# EAGLE board 13513-Spectacle_Button_Board-panel.v10 (EAGLE 7.5.0), part 1 of 3
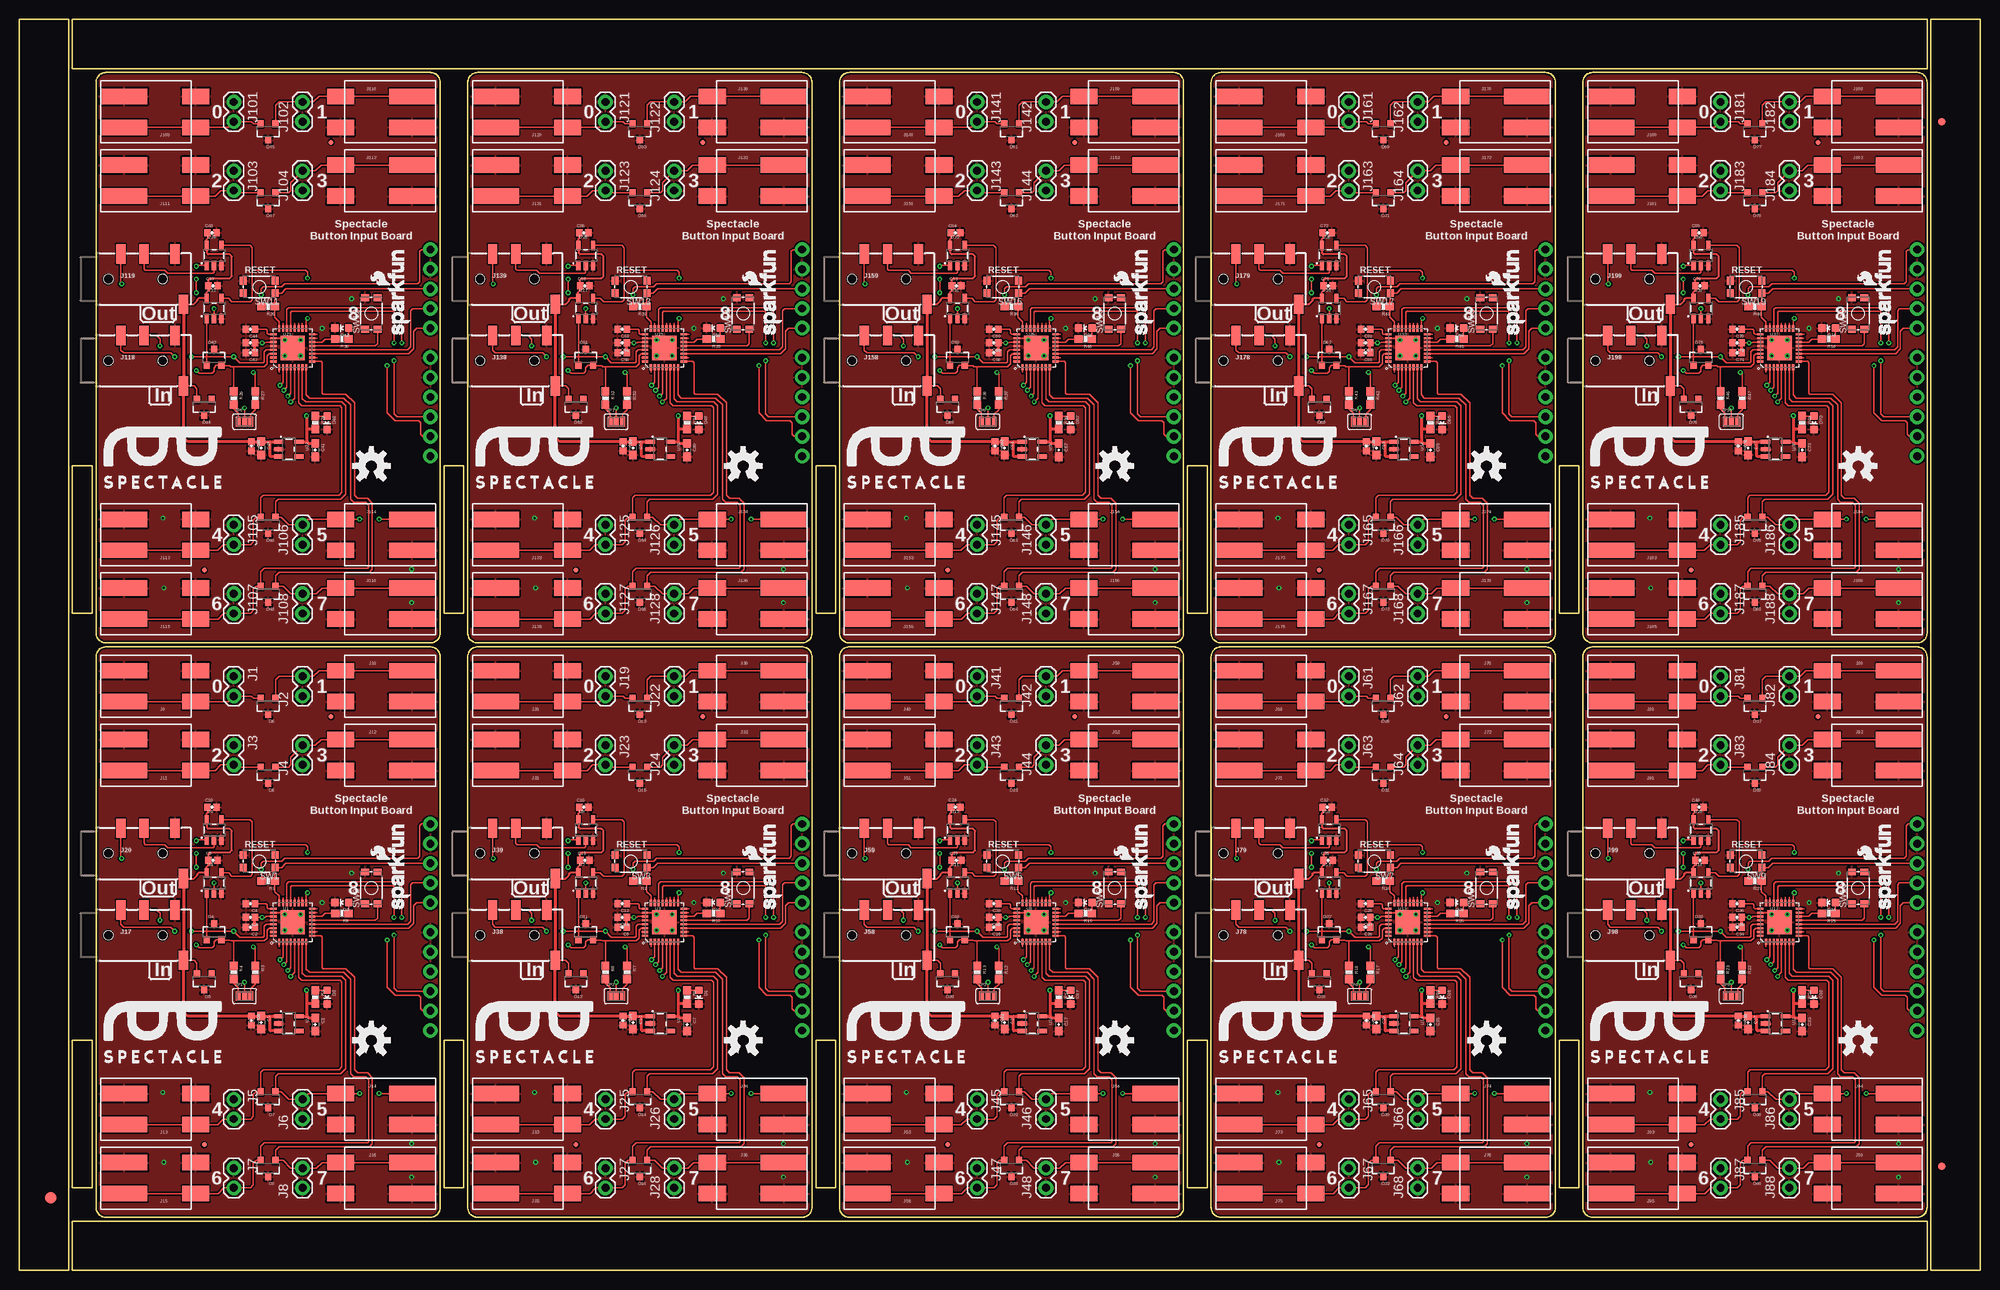
[diagram p0: board, top side]
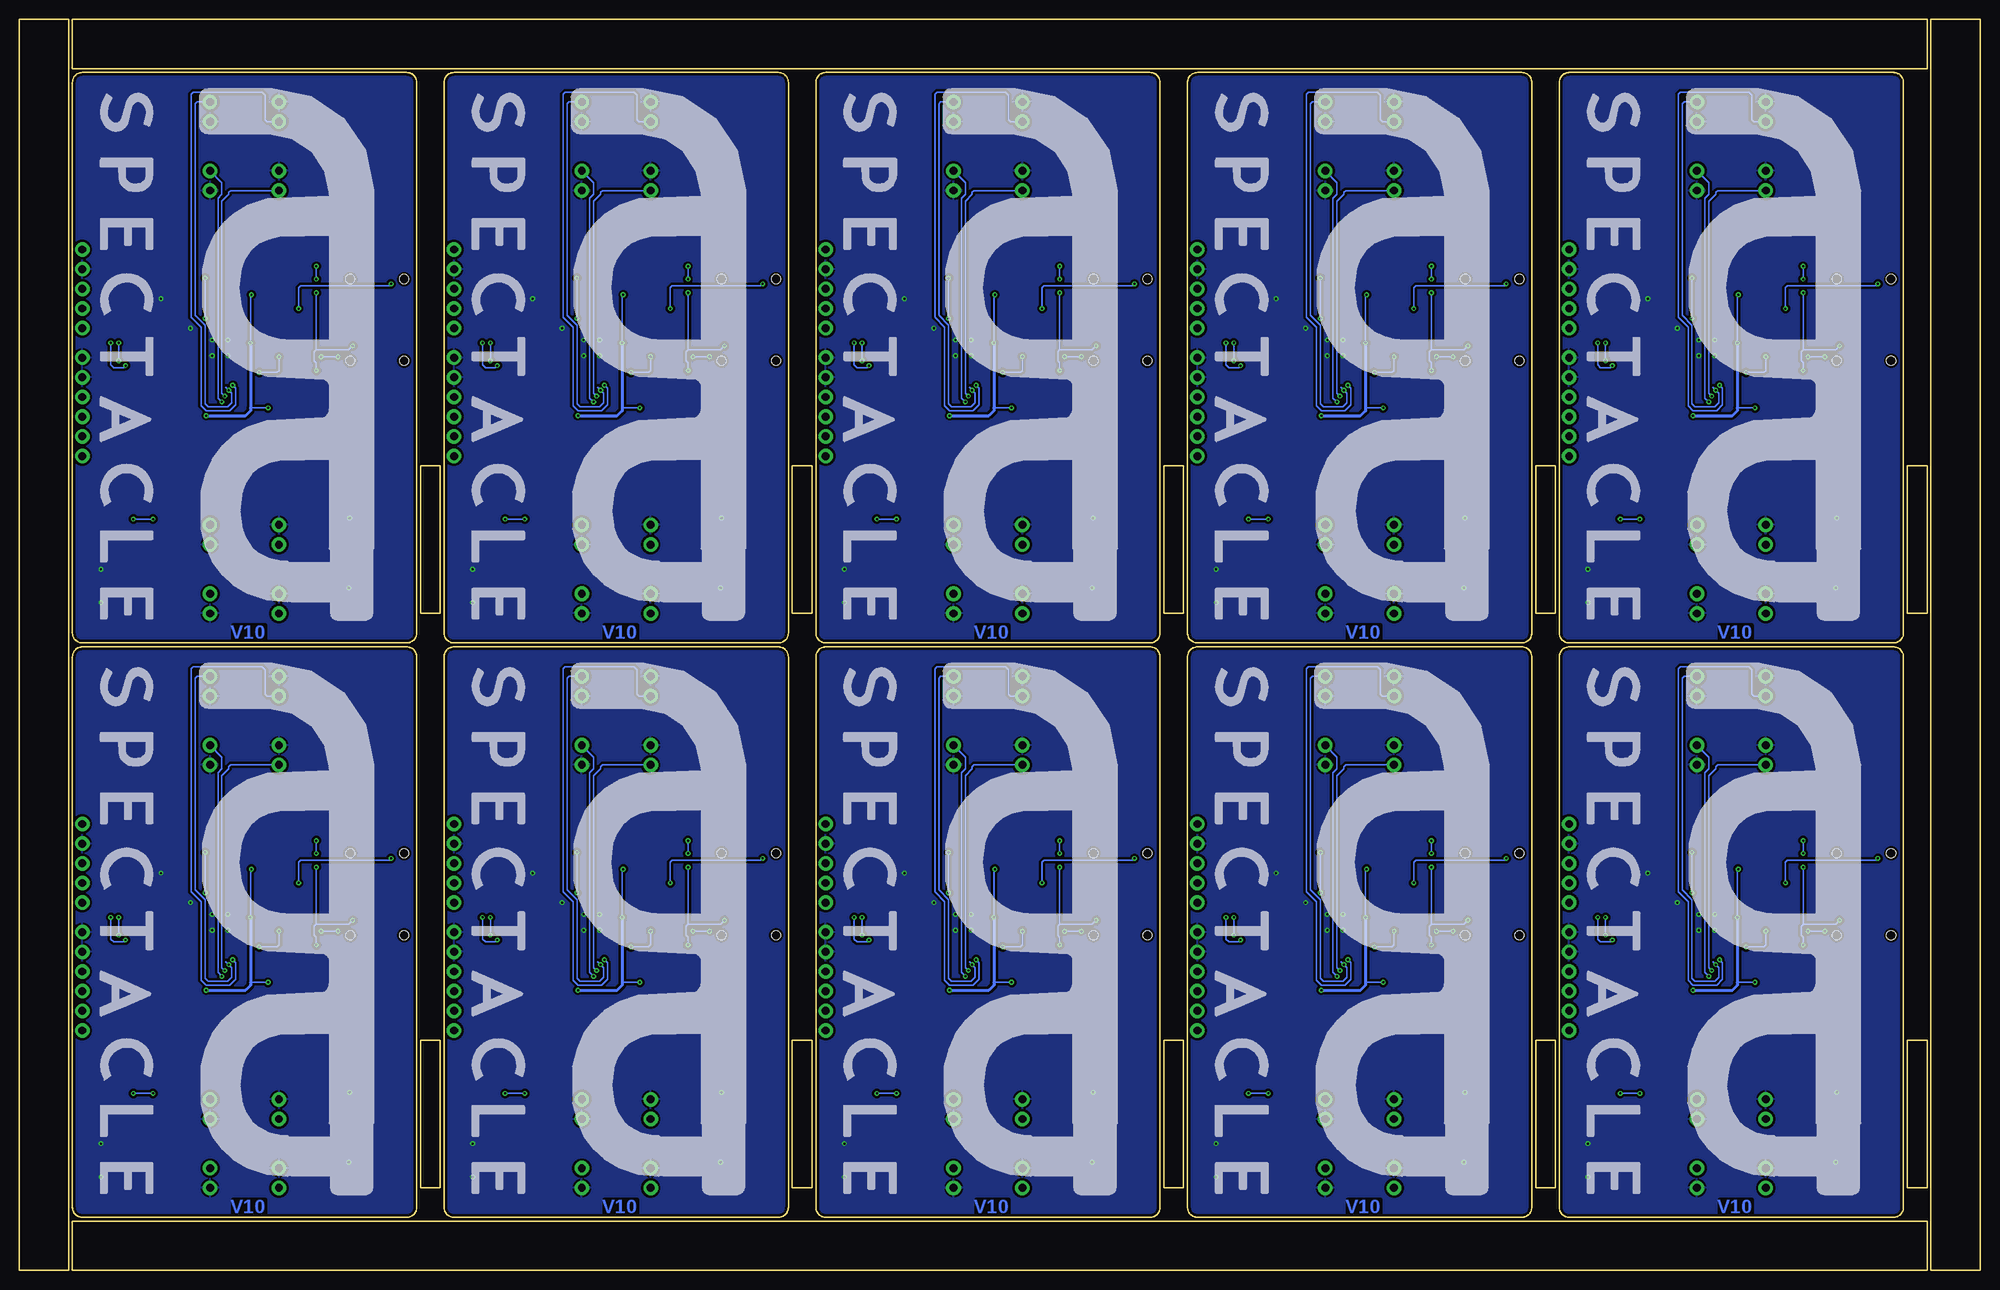
[diagram p1: board, bottom side, seen from below]

Size 253.24 x 161.54 mm. Coordinates in mm from the lower left corner, seen from the top.
Outline: 6.35,79.25 6.35,0 0,0 0,29.72
Outline: 0,27.18 0,161.54 6.35,161.54 6.35,76.71
Outline: 79.25,0 6.86,0 6.86,6.35 29.72,6.35
Outline: 27.18,6.35 246.38,6.35 246.38,0 76.71,0
Outline: 173.99,161.54 246.38,161.54 246.38,155.19 223.52,155.19
Outline: 226.06,155.19 6.86,155.19 6.86,161.54 176.53,161.54
Outline: 246.89,89.15 246.89,161.54 253.24,161.54 253.24,138.68
Outline: 253.24,141.22 253.24,0 246.89,0 246.89,91.69
Outline: 9.91,79.25 9.91,8.13 arc90 11.18,6.86 53.09,6.86 arc90 54.36,8.13 54.36,79.25 arc90 53.09,80.52 11.18,80.52 arc90 9.91,79.25
Outline: 9.4,10.67 9.4,29.72 6.86,29.72 6.86,10.67 9.4,10.67
Outline: 57.91,79.25 57.91,8.13 arc90 59.18,6.86 101.09,6.86 arc90 102.36,8.13 102.36,79.25 arc90 101.09,80.52 59.18,80.52 arc90 57.91,79.25
Outline: 57.4,10.67 57.4,29.72 54.86,29.72 54.86,10.67 57.4,10.67
Outline: 105.92,79.25 105.92,8.13 arc90 107.19,6.86 149.1,6.86 arc90 150.37,8.13 150.37,79.25 arc90 149.1,80.52 107.19,80.52 arc90 105.92,79.25
Outline: 105.41,10.67 105.41,29.72 102.87,29.72 102.87,10.67 105.41,10.67
Outline: 153.92,79.25 153.92,8.13 arc90 155.19,6.86 197.1,6.86 arc90 198.37,8.13 198.37,79.25 arc90 197.1,80.52 155.19,80.52 arc90 153.92,79.25
Outline: 153.42,10.67 153.42,29.72 150.88,29.72 150.88,10.67 153.42,10.67
Outline: 201.93,79.25 201.93,8.13 arc90 203.2,6.86 245.11,6.86 arc90 246.38,8.13 246.38,79.25 arc90 245.11,80.52 203.2,80.52 arc90 201.93,79.25
Outline: 201.42,10.67 201.42,29.72 198.88,29.72 198.88,10.67 201.42,10.67
Outline: 9.91,153.42 9.91,82.3 arc90 11.18,81.03 53.09,81.03 arc90 54.36,82.3 54.36,153.42 arc90 53.09,154.69 11.18,154.69 arc90 9.91,153.42
Outline: 9.4,84.84 9.4,103.89 6.86,103.89 6.86,84.84 9.4,84.84
Outline: 57.91,153.42 57.91,82.3 arc90 59.18,81.03 101.09,81.03 arc90 102.36,82.3 102.36,153.42 arc90 101.09,154.69 59.18,154.69 arc90 57.91,153.42
Outline: 57.4,84.84 57.4,103.89 54.86,103.89 54.86,84.84 57.4,84.84
Outline: 105.92,153.42 105.92,82.3 arc90 107.19,81.03 149.1,81.03 arc90 150.37,82.3 150.37,153.42 arc90 149.1,154.69 107.19,154.69 arc90 105.92,153.42
Outline: 105.41,84.84 105.41,103.89 102.87,103.89 102.87,84.84 105.41,84.84
Outline: 153.92,153.42 153.92,82.3 arc90 155.19,81.03 197.1,81.03 arc90 198.37,82.3 198.37,153.42 arc90 197.1,154.69 155.19,154.69 arc90 153.92,153.42
Outline: 153.42,84.84 153.42,103.89 150.88,103.89 150.88,84.84 153.42,84.84
Outline: 201.93,153.42 201.93,82.3 arc90 203.2,81.03 245.11,81.03 arc90 246.38,82.3 246.38,153.42 arc90 245.11,154.69 203.2,154.69 arc90 201.93,153.42
Outline: 201.42,84.84 201.42,103.89 198.88,103.89 198.88,84.84 201.42,84.84
Copper layers (1*16): Top 0.035mm / dielectric 1.5mm / Bottom 0.035mm
Design rules "SparkFun-2-layer-TIGHT *": minimum track width 7mil, minimum drill 10mil, track to track 7mil, track to pad 7mil, pad to pad 7mil, via to via 7mil, smd to smd 7mil, copper to edge 7mil, drill to drill 7mil, minimum pad ring 7mil, minimum via ring 7mil, stop-mask expansion 4mil, vias tented up to drill 25mil, thermal gap 10mil

## Footprints (pad centres in the part's own frame; a part is rotated, then mirrored left to right if it is on the bottom)
0603-CAP = smd 1.1 x 1: 1 -0.85,0; 2 0.85,0
0402-CAP = smd 0.85 x 0.9: 1 -0.58,0; 2 0.58,0
LED-0603 = smd 1 x 1: A 0,-0.877; C 0,0.877
SOT23-3 = smd 0.8 x 0.9: 1 -0.95,-1; 2 0.95,-1; 3 0,1.1
FIDUCIAL-1.5X3 = smd 1.5 x 1.5: 1 0,0
FIDUCIAL-1X2 = smd 1 x 1: 1 0,0
MICRO-FIDUCIAL = smd 0.635 x 0.635: 1 0,0
1X02 = drill 1.016 pad 1.88: 1 0,0; 2 2.54,0
1X02_POKEHOME = smd 3.5 x 2: P1 5.25,2; P2 5.25,-2 | smd 6 x 2: P3 -4,2; P4 -4,-2
AUDIO_JACK_3.5MM_TRRS_SMD_RA = smd 1.2 x 2.5: EARTH 11.3,-3.25; RING1 6.2,3.25; RING2 3.2,3.25; TIP 10.2,3.25 | hole 1.2: 1.6,0; 8.6,0
1X05_NO_SILK = drill 1.016 pad 1.88: 1 0,0; 2 2.54,0; 3 5.08,0; 4 7.62,0; 5 10.16,0
1X06_NO_SILK = drill 1.016 pad 1.88: 1 0,0; 2 2.54,0; 3 5.08,0; 4 7.62,0; 5 10.16,0; 6 12.7,0
PAD-JUMPER-3-NC_BY_PASTE_YES_SILK_FULL_BOX = smd 0.635 x 1.27: 1 -0.813,0; 2 0,0; 3 0.813,0
0603-RES = smd 1.1 x 1: 1 -0.85,0; 2 0.85,0
TACTILE_SWITCH_SMD_4.6X2.8MM = smd 0.9 x 1: 1 -2.05,-0.8; 2 2.05,-0.8; 3 2.05,0.8; 4 -2.05,0.8
QFN-32 = smd 0.285 x 0.8: 1 -1.75,-2.5; 2 -1.25,-2.5; 3 -0.75,-2.5; 4 -0.25,-2.5; 5 0.25,-2.5; 6 0.75,-2.5; 7 1.25,-2.5; 8 1.75,-2.5; 17 1.75,2.5; 18 1.25,2.5; 19 0.75,2.5; 20 0.25,2.5; 21 -0.25,2.5; 22 -0.75,2.5; 23 -1.25,2.5; 24 -1.75,2.5 | smd 0.8 x 0.285: 9 2.5,-1.75; 10 2.5,-1.25; 11 2.5,-0.75; 12 2.5,-0.25; 13 2.5,0.25; 14 2.5,0.75; 15 2.5,1.25; 16 2.5,1.75; 25 -2.5,1.75; 26 -2.5,1.25; 27 -2.5,0.75; 28 -2.5,0.25; 29 -2.5,-0.25; 30 -2.5,-0.75; 31 -2.5,-1.25; 32 -2.5,-1.75 | smd 3.15 x 3.15: EP 0,0
SOT23-5 = smd 0.55 x 1.2: 1 -0.95,-1.3; 2 0,-1.3; 3 0.95,-1.3; 4 0.95,1.3; 5 -0.95,1.3

## Placement (x,y rotation side)
C1  2.2uF  [0603-CAP]  38.23,31.75 270 top
C2  1.0uF  [0402-CAP]  29.84,44.32 180 top
C3  0.1uF  [0402-CAP]  29.84,45.59 180 top
C4  0.1uF  [0402-CAP]  29.84,47.37 180 top
C5  2.2uF  [0603-CAP]  31.24,32 270 top
C6  0.1uF  [0402-CAP]  29.97,32.26 270 top
C7  2.2uF  [0603-CAP]  86.23,31.75 270 top
C8  1.0uF  [0402-CAP]  77.85,44.32 180 top
C9  0.1uF  [0402-CAP]  25.02,52.96 0 top
C10  0.1uF  [0402-CAP]  24.89,59.82 0 top
C11  0.1uF  [0402-CAP]  77.85,45.59 180 top
C12  0.1uF  [0402-CAP]  77.85,47.37 180 top
C13  2.2uF  [0603-CAP]  79.25,32 270 top
C14  0.1uF  [0402-CAP]  77.98,32.26 270 top
C15  0.1uF  [0402-CAP]  73.03,52.96 0 top
C16  0.1uF  [0402-CAP]  72.9,59.82 0 top
C17  2.2uF  [0603-CAP]  134.24,31.75 270 top
C18  1.0uF  [0402-CAP]  125.86,44.32 180 top
C19  0.1uF  [0402-CAP]  125.86,45.59 180 top
C20  0.1uF  [0402-CAP]  125.86,47.37 180 top
C21  2.2uF  [0603-CAP]  127.25,32 270 top
C22  0.1uF  [0402-CAP]  125.98,32.26 270 top
C23  0.1uF  [0402-CAP]  121.03,52.96 0 top
C24  0.1uF  [0402-CAP]  120.9,59.82 0 top
C25  2.2uF  [0603-CAP]  182.25,31.75 270 top
C26  1.0uF  [0402-CAP]  173.86,44.32 180 top
C27  0.1uF  [0402-CAP]  173.86,45.59 180 top
C28  0.1uF  [0402-CAP]  173.86,47.37 180 top
C29  2.2uF  [0603-CAP]  175.26,32 270 top
C30  0.1uF  [0402-CAP]  173.99,32.26 270 top
C31  0.1uF  [0402-CAP]  169.04,52.96 0 top
C32  0.1uF  [0402-CAP]  168.91,59.82 0 top
C33  2.2uF  [0603-CAP]  230.25,31.75 270 top
C34  1.0uF  [0402-CAP]  221.87,44.32 180 top
C35  0.1uF  [0402-CAP]  221.87,45.59 180 top
C36  0.1uF  [0402-CAP]  221.87,47.37 180 top
C37  2.2uF  [0603-CAP]  223.27,32 270 top
C38  0.1uF  [0402-CAP]  222,32.26 270 top
C39  0.1uF  [0402-CAP]  217.04,52.96 0 top
C40  0.1uF  [0402-CAP]  216.92,59.82 0 top
C41  2.2uF  [0603-CAP]  38.23,105.92 270 top
C42  1.0uF  [0402-CAP]  29.84,118.49 180 top
C43  0.1uF  [0402-CAP]  29.84,119.76 180 top
C44  0.1uF  [0402-CAP]  29.84,121.54 180 top
C45  2.2uF  [0603-CAP]  31.24,106.17 270 top
C46  0.1uF  [0402-CAP]  29.97,106.43 270 top
C47  0.1uF  [0402-CAP]  25.02,127.13 0 top
C48  0.1uF  [0402-CAP]  24.89,133.99 0 top
C49  2.2uF  [0603-CAP]  86.23,105.92 270 top
C50  1.0uF  [0402-CAP]  77.85,118.49 180 top
C51  0.1uF  [0402-CAP]  77.85,119.76 180 top
C52  0.1uF  [0402-CAP]  77.85,121.54 180 top
C53  2.2uF  [0603-CAP]  79.25,106.17 270 top
C54  0.1uF  [0402-CAP]  77.98,106.43 270 top
C55  0.1uF  [0402-CAP]  73.03,127.13 0 top
C56  0.1uF  [0402-CAP]  72.9,133.99 0 top
C57  2.2uF  [0603-CAP]  134.24,105.92 270 top
C58  1.0uF  [0402-CAP]  125.86,118.49 180 top
C59  0.1uF  [0402-CAP]  125.86,119.76 180 top
C60  0.1uF  [0402-CAP]  125.86,121.54 180 top
C61  2.2uF  [0603-CAP]  127.25,106.17 270 top
C62  0.1uF  [0402-CAP]  125.98,106.43 270 top
C63  0.1uF  [0402-CAP]  121.03,127.13 0 top
C64  0.1uF  [0402-CAP]  120.9,133.99 0 top
C65  2.2uF  [0603-CAP]  182.25,105.92 270 top
C66  1.0uF  [0402-CAP]  173.86,118.49 180 top
C67  0.1uF  [0402-CAP]  173.86,119.76 180 top
C68  0.1uF  [0402-CAP]  173.86,121.54 180 top
C69  2.2uF  [0603-CAP]  175.26,106.17 270 top
C70  0.1uF  [0402-CAP]  173.99,106.43 270 top
C71  0.1uF  [0402-CAP]  169.04,127.13 0 top
C72  0.1uF  [0402-CAP]  168.91,133.99 0 top
C73  2.2uF  [0603-CAP]  230.25,105.92 270 top
C74  1.0uF  [0402-CAP]  221.87,118.49 180 top
C75  0.1uF  [0402-CAP]  221.87,119.76 180 top
C76  0.1uF  [0402-CAP]  221.87,121.54 180 top
C77  2.2uF  [0603-CAP]  223.27,106.17 270 top
C78  0.1uF  [0402-CAP]  222,106.43 270 top
C79  0.1uF  [0402-CAP]  217.04,127.13 0 top
C80  0.1uF  [0402-CAP]  216.92,133.99 0 top
D1  RED  [LED-0603]  87.76,35.31 180 top
D2  RED  [LED-0603]  39.75,35.31 180 top
D3  RED  [LED-0603]  41.66,47.5 90 top
D4  PESD1CAN  [SOT23-3]  25.15,43.69 0 top
D5  PESD1CAN  [SOT23-3]  23.88,37.34 180 top
D6  PESD1CAN  [SOT23-3]  32.13,72.9 180 top
D7  PESD1CAN  [SOT23-3]  32.13,22.1 180 top
D8  PESD1CAN  [SOT23-3]  32.13,64.01 180 top
D9  PESD1CAN  [SOT23-3]  32.13,13.21 180 top
D10  RED  [LED-0603]  89.66,47.5 90 top
D11  PESD1CAN  [SOT23-3]  73.15,43.69 0 top
D12  PESD1CAN  [SOT23-3]  71.88,37.34 180 top
D13  PESD1CAN  [SOT23-3]  80.14,72.9 180 top
D14  PESD1CAN  [SOT23-3]  80.14,22.1 180 top
D15  PESD1CAN  [SOT23-3]  80.14,64.01 180 top
D16  PESD1CAN  [SOT23-3]  80.14,13.21 180 top
D17  RED  [LED-0603]  135.76,35.31 180 top
D18  RED  [LED-0603]  137.67,47.5 90 top
D19  PESD1CAN  [SOT23-3]  121.16,43.69 0 top
D20  PESD1CAN  [SOT23-3]  119.89,37.34 180 top
D21  PESD1CAN  [SOT23-3]  128.14,72.9 180 top
D22  PESD1CAN  [SOT23-3]  128.14,22.1 180 top
D23  PESD1CAN  [SOT23-3]  128.14,64.01 180 top
D24  PESD1CAN  [SOT23-3]  128.14,13.21 180 top
D25  RED  [LED-0603]  183.77,35.31 180 top
D26  RED  [LED-0603]  185.67,47.5 90 top
D27  PESD1CAN  [SOT23-3]  169.16,43.69 0 top
D28  PESD1CAN  [SOT23-3]  167.89,37.34 180 top
D29  PESD1CAN  [SOT23-3]  176.15,72.9 180 top
D30  PESD1CAN  [SOT23-3]  176.15,22.1 180 top
D31  PESD1CAN  [SOT23-3]  176.15,64.01 180 top
D32  PESD1CAN  [SOT23-3]  176.15,13.21 180 top
D33  RED  [LED-0603]  231.78,35.31 180 top
D34  RED  [LED-0603]  233.68,47.5 90 top
D35  PESD1CAN  [SOT23-3]  217.17,43.69 0 top
D36  PESD1CAN  [SOT23-3]  215.9,37.34 180 top
D37  PESD1CAN  [SOT23-3]  224.16,72.9 180 top
D38  PESD1CAN  [SOT23-3]  224.16,22.1 180 top
D39  PESD1CAN  [SOT23-3]  224.16,64.01 180 top
D40  PESD1CAN  [SOT23-3]  224.16,13.21 180 top
D41  RED  [LED-0603]  39.75,109.47 180 top
D42  RED  [LED-0603]  41.66,121.67 90 top
D43  PESD1CAN  [SOT23-3]  25.15,117.86 0 top
D44  PESD1CAN  [SOT23-3]  23.88,111.51 180 top
D45  PESD1CAN  [SOT23-3]  32.13,147.07 180 top
D46  PESD1CAN  [SOT23-3]  32.13,96.27 180 top
D47  PESD1CAN  [SOT23-3]  32.13,138.18 180 top
D48  PESD1CAN  [SOT23-3]  32.13,87.38 180 top
D49  RED  [LED-0603]  87.76,109.47 180 top
D50  RED  [LED-0603]  89.66,121.67 90 top
D51  PESD1CAN  [SOT23-3]  73.15,117.86 0 top
D52  PESD1CAN  [SOT23-3]  71.88,111.51 180 top
D53  PESD1CAN  [SOT23-3]  80.14,147.07 180 top
D54  PESD1CAN  [SOT23-3]  80.14,96.27 180 top
D55  PESD1CAN  [SOT23-3]  80.14,138.18 180 top
D56  PESD1CAN  [SOT23-3]  80.14,87.38 180 top
D57  RED  [LED-0603]  135.76,109.47 180 top
D58  RED  [LED-0603]  137.67,121.67 90 top
D59  PESD1CAN  [SOT23-3]  121.16,117.86 0 top
D60  PESD1CAN  [SOT23-3]  119.89,111.51 180 top
D61  PESD1CAN  [SOT23-3]  128.14,147.07 180 top
D62  PESD1CAN  [SOT23-3]  128.14,96.27 180 top
D63  PESD1CAN  [SOT23-3]  128.14,138.18 180 top
D64  PESD1CAN  [SOT23-3]  128.14,87.38 180 top
D65  RED  [LED-0603]  183.77,109.47 180 top
D66  RED  [LED-0603]  185.67,121.67 90 top
D67  PESD1CAN  [SOT23-3]  169.16,117.86 0 top
D68  PESD1CAN  [SOT23-3]  167.89,111.51 180 top
D69  PESD1CAN  [SOT23-3]  176.15,147.07 180 top
D70  PESD1CAN  [SOT23-3]  176.15,96.27 180 top
D71  PESD1CAN  [SOT23-3]  176.15,138.18 180 top
D72  PESD1CAN  [SOT23-3]  176.15,87.38 180 top
D73  RED  [LED-0603]  231.78,109.47 180 top
D74  RED  [LED-0603]  233.68,121.67 90 top
D75  PESD1CAN  [SOT23-3]  217.17,117.86 0 top
D76  PESD1CAN  [SOT23-3]  215.9,111.51 180 top
D77  PESD1CAN  [SOT23-3]  224.16,147.07 180 top
D78  PESD1CAN  [SOT23-3]  224.16,96.27 180 top
D79  PESD1CAN  [SOT23-3]  224.16,138.18 180 top
D80  PESD1CAN  [SOT23-3]  224.16,87.38 180 top
E$1  [FIDUCIAL-1.5X3]  4.06,9.4 0 top
E$7  [FIDUCIAL-1X2]  248.28,148.34 180 top
E$8  [FIDUCIAL-1X2]  248.28,13.46 0 top
FD1  FIDUCIALUFIDUCIAL  [MICRO-FIDUCIAL]  40.26,71.5 0 top
FD2  FIDUCIALUFIDUCIAL  [MICRO-FIDUCIAL]  23.88,16.26 0 top
FD3  FIDUCIALUFIDUCIAL  [MICRO-FIDUCIAL]  88.27,71.5 0 top
FD4  FIDUCIALUFIDUCIAL  [MICRO-FIDUCIAL]  71.88,16.26 0 top
FD5  FIDUCIALUFIDUCIAL  [MICRO-FIDUCIAL]  136.27,71.5 0 top
FD6  FIDUCIALUFIDUCIAL  [MICRO-FIDUCIAL]  119.89,16.26 0 top
FD7  FIDUCIALUFIDUCIAL  [MICRO-FIDUCIAL]  184.28,71.5 0 top
FD8  FIDUCIALUFIDUCIAL  [MICRO-FIDUCIAL]  167.89,16.26 0 top
FD9  FIDUCIALUFIDUCIAL  [MICRO-FIDUCIAL]  232.28,71.5 0 top
FD10  FIDUCIALUFIDUCIAL  [MICRO-FIDUCIAL]  215.9,16.26 0 top
FD11  FIDUCIALUFIDUCIAL  [MICRO-FIDUCIAL]  40.26,145.67 0 top
FD12  FIDUCIALUFIDUCIAL  [MICRO-FIDUCIAL]  23.88,90.42 0 top
FD13  FIDUCIALUFIDUCIAL  [MICRO-FIDUCIAL]  88.27,145.67 0 top
FD14  FIDUCIALUFIDUCIAL  [MICRO-FIDUCIAL]  71.88,90.42 0 top
FD15  FIDUCIALUFIDUCIAL  [MICRO-FIDUCIAL]  136.27,145.67 0 top
FD16  FIDUCIALUFIDUCIAL  [MICRO-FIDUCIAL]  119.89,90.42 0 top
FD17  FIDUCIALUFIDUCIAL  [MICRO-FIDUCIAL]  184.28,145.67 0 top
FD18  FIDUCIALUFIDUCIAL  [MICRO-FIDUCIAL]  167.89,90.42 0 top
FD19  FIDUCIALUFIDUCIAL  [MICRO-FIDUCIAL]  232.28,145.67 0 top
FD20  FIDUCIALUFIDUCIAL  [MICRO-FIDUCIAL]  215.9,90.42 0 top
J1  [1X02]  27.69,76.71 270 top
J2  [1X02]  36.58,74.17 90 top
J3  [1X02]  27.69,67.82 270 top
J4  [1X02]  36.58,65.28 90 top
J5  [1X02]  27.69,22.1 270 top
J6  [1X02]  36.58,19.56 90 top
J7  [1X02]  27.69,13.21 270 top
J8  [1X02]  36.58,10.67 90 top
J9  [1X02_POKEHOME]  17.53,75.44 0 top
J10  [1X02_POKEHOME]  46.74,75.44 180 top
J11  [1X02_POKEHOME]  17.53,66.55 0 top
J12  [1X02_POKEHOME]  46.74,66.55 180 top
J13  [1X02_POKEHOME]  17.53,20.83 0 top
J14  [1X02_POKEHOME]  46.74,20.83 180 top
J15  [1X02_POKEHOME]  17.53,11.94 0 top
J16  [1X02_POKEHOME]  46.74,11.94 180 top
J17  AUDIO_JACK_TRRSSMD_RA  [AUDIO_JACK_3.5MM_TRRS_SMD_RA]  9.91,43.31 0 top
J18  [1X05_NO_SILK]  53.09,57.66 270 top
J19  [1X02]  75.69,76.71 270 top
J20  AUDIO_JACK_TRRSSMD_RA  [AUDIO_JACK_3.5MM_TRRS_SMD_RA]  9.91,53.85 0 top
J21  [1X06_NO_SILK]  53.09,43.69 270 top
J22  [1X02]  84.58,74.17 90 top
J23  [1X02]  75.69,67.82 270 top
J24  [1X02]  84.58,65.28 90 top
J25  [1X02]  75.69,22.1 270 top
J26  [1X02]  84.58,19.56 90 top
J27  [1X02]  75.69,13.21 270 top
J28  [1X02]  84.58,10.67 90 top
J29  [1X02_POKEHOME]  65.53,75.44 0 top
J30  [1X02_POKEHOME]  94.74,75.44 180 top
J31  [1X02_POKEHOME]  65.53,66.55 0 top
J32  [1X02_POKEHOME]  94.74,66.55 180 top
J33  [1X02_POKEHOME]  65.53,20.83 0 top
J34  [1X02_POKEHOME]  94.74,20.83 180 top
J35  [1X02_POKEHOME]  65.53,11.94 0 top
J36  [1X02_POKEHOME]  94.74,11.94 180 top
J37  [1X05_NO_SILK]  101.09,57.66 270 top
J38  AUDIO_JACK_TRRSSMD_RA  [AUDIO_JACK_3.5MM_TRRS_SMD_RA]  57.91,43.31 0 top
J39  AUDIO_JACK_TRRSSMD_RA  [AUDIO_JACK_3.5MM_TRRS_SMD_RA]  57.91,53.85 0 top
J40  [1X06_NO_SILK]  101.09,43.69 270 top
J41  [1X02]  123.7,76.71 270 top
J42  [1X02]  132.59,74.17 90 top
J43  [1X02]  123.7,67.82 270 top
J44  [1X02]  132.59,65.28 90 top
J45  [1X02]  123.7,22.1 270 top
J46  [1X02]  132.59,19.56 90 top
J47  [1X02]  123.7,13.21 270 top
J48  [1X02]  132.59,10.67 90 top
J49  [1X02_POKEHOME]  113.54,75.44 0 top
J50  [1X02_POKEHOME]  142.75,75.44 180 top
J51  [1X02_POKEHOME]  113.54,66.55 0 top
J52  [1X02_POKEHOME]  142.75,66.55 180 top
J53  [1X02_POKEHOME]  113.54,20.83 0 top
J54  [1X02_POKEHOME]  142.75,20.83 180 top
J55  [1X02_POKEHOME]  113.54,11.94 0 top
J56  [1X02_POKEHOME]  142.75,11.94 180 top
J57  [1X05_NO_SILK]  149.1,57.66 270 top
J58  AUDIO_JACK_TRRSSMD_RA  [AUDIO_JACK_3.5MM_TRRS_SMD_RA]  105.92,43.31 0 top
J59  AUDIO_JACK_TRRSSMD_RA  [AUDIO_JACK_3.5MM_TRRS_SMD_RA]  105.92,53.85 0 top
J60  [1X06_NO_SILK]  149.1,43.69 270 top
J61  [1X02]  171.7,76.71 270 top
J62  [1X02]  180.59,74.17 90 top
J63  [1X02]  171.7,67.82 270 top
J64  [1X02]  180.59,65.28 90 top
J65  [1X02]  171.7,22.1 270 top
J66  [1X02]  180.59,19.56 90 top
J67  [1X02]  171.7,13.21 270 top
J68  [1X02]  180.59,10.67 90 top
J69  [1X02_POKEHOME]  161.54,75.44 0 top
J70  [1X02_POKEHOME]  190.75,75.44 180 top
J71  [1X02_POKEHOME]  161.54,66.55 0 top
J72  [1X02_POKEHOME]  190.75,66.55 180 top
J73  [1X02_POKEHOME]  161.54,20.83 0 top
J74  [1X02_POKEHOME]  190.75,20.83 180 top
J75  [1X02_POKEHOME]  161.54,11.94 0 top
J76  [1X02_POKEHOME]  190.75,11.94 180 top
J77  [1X05_NO_SILK]  197.1,57.66 270 top
J78  AUDIO_JACK_TRRSSMD_RA  [AUDIO_JACK_3.5MM_TRRS_SMD_RA]  153.92,43.31 0 top
J79  AUDIO_JACK_TRRSSMD_RA  [AUDIO_JACK_3.5MM_TRRS_SMD_RA]  153.92,53.85 0 top
J80  [1X06_NO_SILK]  197.1,43.69 270 top
J81  [1X02]  219.71,76.71 270 top
J82  [1X02]  228.6,74.17 90 top
J83  [1X02]  219.71,67.82 270 top
J84  [1X02]  228.6,65.28 90 top
J85  [1X02]  219.71,22.1 270 top
J86  [1X02]  228.6,19.56 90 top
J87  [1X02]  219.71,13.21 270 top
J88  [1X02]  228.6,10.67 90 top
J89  [1X02_POKEHOME]  209.55,75.44 0 top
J90  [1X02_POKEHOME]  238.76,75.44 180 top
J91  [1X02_POKEHOME]  209.55,66.55 0 top
J92  [1X02_POKEHOME]  238.76,66.55 180 top
J93  [1X02_POKEHOME]  209.55,20.83 0 top
J94  [1X02_POKEHOME]  238.76,20.83 180 top
J95  [1X02_POKEHOME]  209.55,11.94 0 top
J96  [1X02_POKEHOME]  238.76,11.94 180 top
J97  [1X05_NO_SILK]  245.11,57.66 270 top
J98  AUDIO_JACK_TRRSSMD_RA  [AUDIO_JACK_3.5MM_TRRS_SMD_RA]  201.93,43.31 0 top
J99  AUDIO_JACK_TRRSSMD_RA  [AUDIO_JACK_3.5MM_TRRS_SMD_RA]  201.93,53.85 0 top
J100  [1X06_NO_SILK]  245.11,43.69 270 top
J101  [1X02]  27.69,150.88 270 top
J102  [1X02]  36.58,148.34 90 top
J103  [1X02]  27.69,141.99 270 top
J104  [1X02]  36.58,139.45 90 top
J105  [1X02]  27.69,96.27 270 top
J106  [1X02]  36.58,93.73 90 top
J107  [1X02]  27.69,87.38 270 top
J108  [1X02]  36.58,84.84 90 top
J109  [1X02_POKEHOME]  17.53,149.61 0 top
J110  [1X02_POKEHOME]  46.74,149.61 180 top
J111  [1X02_POKEHOME]  17.53,140.72 0 top
J112  [1X02_POKEHOME]  46.74,140.72 180 top
J113  [1X02_POKEHOME]  17.53,95 0 top
J114  [1X02_POKEHOME]  46.74,95 180 top
J115  [1X02_POKEHOME]  17.53,86.11 0 top
J116  [1X02_POKEHOME]  46.74,86.11 180 top
J117  [1X05_NO_SILK]  53.09,131.83 270 top
J118  AUDIO_JACK_TRRSSMD_RA  [AUDIO_JACK_3.5MM_TRRS_SMD_RA]  9.91,117.47 0 top
J119  AUDIO_JACK_TRRSSMD_RA  [AUDIO_JACK_3.5MM_TRRS_SMD_RA]  9.91,128.02 0 top
J120  [1X06_NO_SILK]  53.09,117.86 270 top
J121  [1X02]  75.69,150.88 270 top
J122  [1X02]  84.58,148.34 90 top
J123  [1X02]  75.69,141.99 270 top
J124  [1X02]  84.58,139.45 90 top
J125  [1X02]  75.69,96.27 270 top
J126  [1X02]  84.58,93.73 90 top
J127  [1X02]  75.69,87.38 270 top
J128  [1X02]  84.58,84.84 90 top
J129  [1X02_POKEHOME]  65.53,149.61 0 top
J130  [1X02_POKEHOME]  94.74,149.61 180 top
J131  [1X02_POKEHOME]  65.53,140.72 0 top
J132  [1X02_POKEHOME]  94.74,140.72 180 top
J133  [1X02_POKEHOME]  65.53,95 0 top
J134  [1X02_POKEHOME]  94.74,95 180 top
J135  [1X02_POKEHOME]  65.53,86.11 0 top
J136  [1X02_POKEHOME]  94.74,86.11 180 top
J137  [1X05_NO_SILK]  101.09,131.83 270 top
J138  AUDIO_JACK_TRRSSMD_RA  [AUDIO_JACK_3.5MM_TRRS_SMD_RA]  57.91,117.47 0 top
J139  AUDIO_JACK_TRRSSMD_RA  [AUDIO_JACK_3.5MM_TRRS_SMD_RA]  57.91,128.02 0 top
J140  [1X06_NO_SILK]  101.09,117.86 270 top
J141  [1X02]  123.7,150.88 270 top
J142  [1X02]  132.59,148.34 90 top
J143  [1X02]  123.7,141.99 270 top
J144  [1X02]  132.59,139.45 90 top
J145  [1X02]  123.7,96.27 270 top
J146  [1X02]  132.59,93.73 90 top
J147  [1X02]  123.7,87.38 270 top
J148  [1X02]  132.59,84.84 90 top
J149  [1X02_POKEHOME]  113.54,149.61 0 top
J150  [1X02_POKEHOME]  142.75,149.61 180 top
J151  [1X02_POKEHOME]  113.54,140.72 0 top
J152  [1X02_POKEHOME]  142.75,140.72 180 top
J153  [1X02_POKEHOME]  113.54,95 0 top
J154  [1X02_POKEHOME]  142.75,95 180 top
J155  [1X02_POKEHOME]  113.54,86.11 0 top
J156  [1X02_POKEHOME]  142.75,86.11 180 top
J157  [1X05_NO_SILK]  149.1,131.83 270 top
J158  AUDIO_JACK_TRRSSMD_RA  [AUDIO_JACK_3.5MM_TRRS_SMD_RA]  105.92,117.47 0 top
J159  AUDIO_JACK_TRRSSMD_RA  [AUDIO_JACK_3.5MM_TRRS_SMD_RA]  105.92,128.02 0 top
J160  [1X06_NO_SILK]  149.1,117.86 270 top
J161  [1X02]  171.7,150.88 270 top
J162  [1X02]  180.59,148.34 90 top
J163  [1X02]  171.7,141.99 270 top
J164  [1X02]  180.59,139.45 90 top
J165  [1X02]  171.7,96.27 270 top
J166  [1X02]  180.59,93.73 90 top
J167  [1X02]  171.7,87.38 270 top
J168  [1X02]  180.59,84.84 90 top
J169  [1X02_POKEHOME]  161.54,149.61 0 top
J170  [1X02_POKEHOME]  190.75,149.61 180 top
J171  [1X02_POKEHOME]  161.54,140.72 0 top
J172  [1X02_POKEHOME]  190.75,140.72 180 top
J173  [1X02_POKEHOME]  161.54,95 0 top
J174  [1X02_POKEHOME]  190.75,95 180 top
J175  [1X02_POKEHOME]  161.54,86.11 0 top
J176  [1X02_POKEHOME]  190.75,86.11 180 top
J177  [1X05_NO_SILK]  197.1,131.83 270 top
J178  AUDIO_JACK_TRRSSMD_RA  [AUDIO_JACK_3.5MM_TRRS_SMD_RA]  153.92,117.47 0 top
J179  AUDIO_JACK_TRRSSMD_RA  [AUDIO_JACK_3.5MM_TRRS_SMD_RA]  153.92,128.02 0 top
J180  [1X06_NO_SILK]  197.1,117.86 270 top
J181  [1X02]  219.71,150.88 270 top
J182  [1X02]  228.6,148.34 90 top
J183  [1X02]  219.71,141.99 270 top
J184  [1X02]  228.6,139.45 90 top
J185  [1X02]  219.71,96.27 270 top
J186  [1X02]  228.6,93.73 90 top
J187  [1X02]  219.71,87.38 270 top
J188  [1X02]  228.6,84.84 90 top
J189  [1X02_POKEHOME]  209.55,149.61 0 top
J190  [1X02_POKEHOME]  238.76,149.61 180 top
J191  [1X02_POKEHOME]  209.55,140.72 0 top
J192  [1X02_POKEHOME]  238.76,140.72 180 top
J193  [1X02_POKEHOME]  209.55,95 0 top
J194  [1X02_POKEHOME]  238.76,95 180 top
J195  [1X02_POKEHOME]  209.55,86.11 0 top
J196  [1X02_POKEHOME]  238.76,86.11 180 top
J197  [1X05_NO_SILK]  245.11,131.83 270 top
J198  AUDIO_JACK_TRRSSMD_RA  [AUDIO_JACK_3.5MM_TRRS_SMD_RA]  201.93,117.47 0 top
J199  AUDIO_JACK_TRRSSMD_RA  [AUDIO_JACK_3.5MM_TRRS_SMD_RA]  201.93,128.02 0 top
J200  [1X06_NO_SILK]  245.11,117.86 270 top
JP1  JUMPER-PAD-3-NC_BY_PASTE  [PAD-JUMPER-3-NC_BY_PASTE_YES_SILK_FULL_BOX]  29.08,35.43 0 top
JP2  JUMPER-PAD-3-NC_BY_PASTE  [PAD-JUMPER-3-NC_BY_PASTE_YES_SILK_FULL_BOX]  77.09,35.43 0 top
JP3  JUMPER-PAD-3-NC_BY_PASTE  [PAD-JUMPER-3-NC_BY_PASTE_YES_SILK_FULL_BOX]  125.09,35.43 0 top
JP4  JUMPER-PAD-3-NC_BY_PASTE  [PAD-JUMPER-3-NC_BY_PASTE_YES_SILK_FULL_BOX]  173.1,35.43 0 top
JP5  JUMPER-PAD-3-NC_BY_PASTE  [PAD-JUMPER-3-NC_BY_PASTE_YES_SILK_FULL_BOX]  221.11,35.43 0 top
JP6  JUMPER-PAD-3-NC_BY_PASTE  [PAD-JUMPER-3-NC_BY_PASTE_YES_SILK_FULL_BOX]  29.08,109.6 0 top
JP7  JUMPER-PAD-3-NC_BY_PASTE  [PAD-JUMPER-3-NC_BY_PASTE_YES_SILK_FULL_BOX]  77.09,109.6 0 top
JP8  JUMPER-PAD-3-NC_BY_PASTE  [PAD-JUMPER-3-NC_BY_PASTE_YES_SILK_FULL_BOX]  125.09,109.6 0 top
JP9  JUMPER-PAD-3-NC_BY_PASTE  [PAD-JUMPER-3-NC_BY_PASTE_YES_SILK_FULL_BOX]  173.1,109.6 0 top
JP10  JUMPER-PAD-3-NC_BY_PASTE  [PAD-JUMPER-3-NC_BY_PASTE_YES_SILK_FULL_BOX]  221.11,109.6 0 top
LOGO1  OSHW-LOGOM  [OSHW-LOGO-M]  45.47,29.72 0 top
LOGO2  SFE_LOGO_NAME_FLAME.1_INCH  [SFE_LOGO_NAME_FLAME_.1]  50.55,46.23 90 top
LOGO3  OSHW-LOGOM  [OSHW-LOGO-M]  93.47,29.72 0 top
LOGO4  SFE_LOGO_NAME_FLAME.1_INCH  [SFE_LOGO_NAME_FLAME_.1]  98.55,46.23 90 top
LOGO5  OSHW-LOGOM  [OSHW-LOGO-M]  141.48,29.72 0 top
LOGO6  SFE_LOGO_NAME_FLAME.1_INCH  [SFE_LOGO_NAME_FLAME_.1]  146.56,46.23 90 top
LOGO7  OSHW-LOGOM  [OSHW-LOGO-M]  189.48,29.72 0 top
LOGO8  SFE_LOGO_NAME_FLAME.1_INCH  [SFE_LOGO_NAME_FLAME_.1]  194.56,46.23 90 top
LOGO9  OSHW-LOGOM  [OSHW-LOGO-M]  237.49,29.72 0 top
LOGO10  SFE_LOGO_NAME_FLAME.1_INCH  [SFE_LOGO_NAME_FLAME_.1]  242.57,46.23 90 top
LOGO11  OSHW-LOGOM  [OSHW-LOGO-M]  45.47,103.89 0 top
LOGO12  SFE_LOGO_NAME_FLAME.1_INCH  [SFE_LOGO_NAME_FLAME_.1]  50.55,120.4 90 top
LOGO13  OSHW-LOGOM  [OSHW-LOGO-M]  93.47,103.89 0 top
LOGO14  SFE_LOGO_NAME_FLAME.1_INCH  [SFE_LOGO_NAME_FLAME_.1]  98.55,120.4 90 top
LOGO15  OSHW-LOGOM  [OSHW-LOGO-M]  141.48,103.89 0 top
LOGO16  SFE_LOGO_NAME_FLAME.1_INCH  [SFE_LOGO_NAME_FLAME_.1]  146.56,120.4 90 top
LOGO17  OSHW-LOGOM  [OSHW-LOGO-M]  189.48,103.89 0 top
LOGO18  SFE_LOGO_NAME_FLAME.1_INCH  [SFE_LOGO_NAME_FLAME_.1]  194.56,120.4 90 top
LOGO19  OSHW-LOGOM  [OSHW-LOGO-M]  237.49,103.89 0 top
LOGO20  SFE_LOGO_NAME_FLAME.1_INCH  [SFE_LOGO_NAME_FLAME_.1]  242.57,120.4 90 top
R1  10K  [0603-RES]  32.13,50.29 180 top
R2  10K  [0603-RES]  80.14,50.29 180 top
R3  4.7K  [0603-RES]  30.48,38.48 270 top
R4  4.7K  [0603-RES]  27.69,38.48 270 top
R5  1K  [0603-RES]  38.23,35.31 270 top
R6  1K  [0603-RES]  41.66,46.1 180 top
R7  4.7K  [0603-RES]  78.49,38.48 270 top
R8  4.7K  [0603-RES]  75.69,38.48 270 top
R9  1K  [0603-RES]  86.23,35.31 270 top
R10  1K  [0603-RES]  89.66,46.1 180 top
R11  10K  [0603-RES]  128.14,50.29 180 top
R12  4.7K  [0603-RES]  126.49,38.48 270 top
R13  4.7K  [0603-RES]  123.7,38.48 270 top
R14  1K  [0603-RES]  134.24,35.31 270 top
R15  1K  [0603-RES]  137.67,46.1 180 top
R16  10K  [0603-RES]  176.15,50.29 180 top
R17  4.7K  [0603-RES]  174.5,38.48 270 top
R18  4.7K  [0603-RES]  171.7,38.48 270 top
R19  1K  [0603-RES]  182.25,35.31 270 top
R20  1K  [0603-RES]  185.67,46.1 180 top
R21  10K  [0603-RES]  224.16,50.29 180 top
R22  4.7K  [0603-RES]  222.5,38.48 270 top
R23  4.7K  [0603-RES]  219.71,38.48 270 top
R24  1K  [0603-RES]  230.25,35.31 270 top
R25  1K  [0603-RES]  233.68,46.1 180 top
R26  10K  [0603-RES]  32.13,124.46 180 top
R27  4.7K  [0603-RES]  30.48,112.65 270 top
R28  4.7K  [0603-RES]  27.69,112.65 270 top
R29  1K  [0603-RES]  38.23,109.47 270 top
R30  1K  [0603-RES]  41.66,120.27 180 top
R31  10K  [0603-RES]  80.14,124.46 180 top
R32  4.7K  [0603-RES]  78.49,112.65 270 top
R33  4.7K  [0603-RES]  75.69,112.65 270 top
R34  1K  [0603-RES]  86.23,109.47 270 top
R35  1K  [0603-RES]  89.66,120.27 180 top
R36  10K  [0603-RES]  128.14,124.46 180 top
R37  4.7K  [0603-RES]  126.49,112.65 270 top
R38  4.7K  [0603-RES]  123.7,112.65 270 top
R39  1K  [0603-RES]  134.24,109.47 270 top
R40  1K  [0603-RES]  137.67,120.27 180 top
R41  10K  [0603-RES]  176.15,124.46 180 top
R42  4.7K  [0603-RES]  174.5,112.65 270 top
R43  4.7K  [0603-RES]  171.7,112.65 270 top
R44  1K  [0603-RES]  182.25,109.47 270 top
R45  1K  [0603-RES]  185.67,120.27 180 top
R46  10K  [0603-RES]  224.16,124.46 180 top
R47  4.7K  [0603-RES]  222.5,112.65 270 top
R48  4.7K  [0603-RES]  219.71,112.65 270 top
R49  1K  [0603-RES]  230.25,109.47 270 top
R50  1K  [0603-RES]  233.68,120.27 180 top
SW1  [TACTILE_SWITCH_SMD_4.6X2.8MM]  30.99,52.83 180 top
SW2  [TACTILE_SWITCH_SMD_4.6X2.8MM]  45.47,49.4 90 top
SW3  [TACTILE_SWITCH_SMD_4.6X2.8MM]  78.99,52.83 180 top
SW4  [TACTILE_SWITCH_SMD_4.6X2.8MM]  93.47,49.4 90 top
SW5  [TACTILE_SWITCH_SMD_4.6X2.8MM]  127,52.83 180 top
SW6  [TACTILE_SWITCH_SMD_4.6X2.8MM]  141.48,49.4 90 top
SW7  [TACTILE_SWITCH_SMD_4.6X2.8MM]  175.01,52.83 180 top
SW8  [TACTILE_SWITCH_SMD_4.6X2.8MM]  189.48,49.4 90 top
SW9  [TACTILE_SWITCH_SMD_4.6X2.8MM]  223.01,52.83 180 top
SW10  [TACTILE_SWITCH_SMD_4.6X2.8MM]  237.49,49.4 90 top
SW11  [TACTILE_SWITCH_SMD_4.6X2.8MM]  30.99,127 180 top
SW12  [TACTILE_SWITCH_SMD_4.6X2.8MM]  45.47,123.57 90 top
SW13  [TACTILE_SWITCH_SMD_4.6X2.8MM]  78.99,127 180 top
SW14  [TACTILE_SWITCH_SMD_4.6X2.8MM]  93.47,123.57 90 top
SW15  [TACTILE_SWITCH_SMD_4.6X2.8MM]  127,127 180 top
SW16  [TACTILE_SWITCH_SMD_4.6X2.8MM]  141.48,123.57 90 top
SW17  [TACTILE_SWITCH_SMD_4.6X2.8MM]  175.01,127 180 top
SW18  [TACTILE_SWITCH_SMD_4.6X2.8MM]  189.48,123.57 90 top
SW19  [TACTILE_SWITCH_SMD_4.6X2.8MM]  223.01,127 180 top
SW20  [TACTILE_SWITCH_SMD_4.6X2.8MM]  237.49,123.57 90 top
U1  CY8C4146LQI-S422  [QFN-32]  35.31,44.96 0 top
U2  3.3V  [SOT23-5]  34.8,31.88 270 top
U3  CY8C4146LQI-S422  [QFN-32]  83.31,44.96 0 top
U4  SN74LVC1G66  [SOT23-5]  25.15,50.04 0 top
U5  SN74LVC1G66  [SOT23-5]  25.15,56.9 0 top
U6  3.3V  [SOT23-5]  82.8,31.88 270 top
U7  SN74LVC1G66  [SOT23-5]  73.15,50.04 0 top
U8  SN74LVC1G66  [SOT23-5]  73.15,56.9 0 top
U9  CY8C4146LQI-S422  [QFN-32]  131.32,44.96 0 top
U10  3.3V  [SOT23-5]  130.81,31.88 270 top
U11  SN74LVC1G66  [SOT23-5]  121.16,50.04 0 top
U12  SN74LVC1G66  [SOT23-5]  121.16,56.9 0 top
U13  CY8C4146LQI-S422  [QFN-32]  179.32,44.96 0 top
U14  3.3V  [SOT23-5]  178.82,31.88 270 top
U15  SN74LVC1G66  [SOT23-5]  169.16,50.04 0 top
U16  SN74LVC1G66  [SOT23-5]  169.16,56.9 0 top
U17  CY8C4146LQI-S422  [QFN-32]  227.33,44.96 0 top
U18  3.3V  [SOT23-5]  226.82,31.88 270 top
U19  SN74LVC1G66  [SOT23-5]  217.17,50.04 0 top
U20  SN74LVC1G66  [SOT23-5]  217.17,56.9 0 top
U21  CY8C4146LQI-S422  [QFN-32]  35.31,119.13 0 top
U22  3.3V  [SOT23-5]  34.8,106.05 270 top
U23  SN74LVC1G66  [SOT23-5]  25.15,124.21 0 top
U24  SN74LVC1G66  [SOT23-5]  25.15,131.06 0 top
U25  CY8C4146LQI-S422  [QFN-32]  83.31,119.13 0 top
U26  3.3V  [SOT23-5]  82.8,106.05 270 top
U27  SN74LVC1G66  [SOT23-5]  73.15,124.21 0 top
U28  SN74LVC1G66  [SOT23-5]  73.15,131.06 0 top
U29  CY8C4146LQI-S422  [QFN-32]  131.32,119.13 0 top
U30  3.3V  [SOT23-5]  130.81,106.05 270 top
U31  SN74LVC1G66  [SOT23-5]  121.16,124.21 0 top
U32  SN74LVC1G66  [SOT23-5]  121.16,131.06 0 top
U33  CY8C4146LQI-S422  [QFN-32]  179.32,119.13 0 top
U34  3.3V  [SOT23-5]  178.82,106.05 270 top
U35  SN74LVC1G66  [SOT23-5]  169.16,124.21 0 top
U36  SN74LVC1G66  [SOT23-5]  169.16,131.06 0 top
U37  CY8C4146LQI-S422  [QFN-32]  227.33,119.13 0 top
U38  3.3V  [SOT23-5]  226.82,106.05 270 top
U39  SN74LVC1G66  [SOT23-5]  217.17,124.21 0 top
U40  SN74LVC1G66  [SOT23-5]  217.17,131.06 0 top

## Library data of the parts
C1 C5 C7 C13 C17 C21 C25 C29 C33 C37 C41 C45 C49 C53 C57 C61 C65 C69 C73 C77 = SparkFun-Capacitors; PROD_ID: CAP-07888
C2 C8 C18 C26 C34 C42 C50 C58 C66 C74 = SparkFun-Capacitors; PROD_ID: CAP-12417
C3 C4 C6 C9-C12 C14-C16 C19 C20 C22-C24 C27 C28 C30-C32 C35 C36 C38-C40 C43 C44 C46-C48 C51 C52 C54-C56 C59 C60 C62-C64 C67 C68 C70-C72 C75 C76 C78-C80 = SparkFun-Capacitors; PROD_ID: CAP-12416
D1-D3 D10 D17 D18 D25 D26 D33 D34 D41 D42 D49 D50 D57 D58 D65 D66 D73 D74 = SparkFun-LED; PROD_ID: DIO-00819
D4-D9 D11-D16 D19-D24 D27-D32 D35-D40 D43-D48 D51-D56 D59-D64 D67-D72 D75-D80 = SparkFun-DiscreteSemi; PROD_ID: DIO-12501
E$1 = SparkFun-Retired
E$7 E$8 FD1-FD20 LOGO1-LOGO20 = SparkFun-Aesthetics
J1-J8 J18 J19 J21-J28 J37 J40-J48 J57 J60-J68 J77 J80-J88 J97 J100-J108 J117 J120-J128 J137 J140-J148 J157 J160-J168 J177 J180-J188 J197 J200 = SparkFun-Connectors
J9-J16 J29-J36 J49-J56 J69-J76 J89-J96 J109-J116 J129-J136 J149-J156 J169-J176 J189-J196 = SparkFun-Connectors; PROD_ID: CONN-13512
J17 J20 J38 J39 J58 J59 J78 J79 J98 J99 J118 J119 J138 J139 J158 J159 J178 J179 J198 J199 = SparkFun-Connectors; PROD_ID: CONN-10676; SF_ID: PRT-12639
JP1-JP10 = SparkFun-Passives
R1 R2 R11 R16 R21 R26 R31 R36 R41 R46 = SparkFun-Resistors; PROD_ID: RES-00824
R3 R4 R7 R8 R12 R13 R17 R18 R22 R23 R27 R28 R32 R33 R37 R38 R42 R43 R47 R48 = SparkFun-Resistors; PROD_ID: RES-07857
R5 R6 R9 R10 R14 R15 R19 R20 R24 R25 R29 R30 R34 R35 R39 R40 R44 R45 R49 R50 = SparkFun-Resistors; PROD_ID: RES-07856
SW1-SW20 = SparkFun-Electromechanical; PROD_ID: SWCH-13065
U1 U3 U9 U13 U17 U21 U25 U29 U33 U37 = SparkFun-DigitalIC; PROD_ID: IC-13286
U2 U6 U10 U14 U18 U22 U26 U30 U34 U38 = SparkFun-PowerIC; PROD_ID: VREG-12457
U4 U5 U7 U8 U11 U12 U15 U16 U19 U20 U23 U24 U27 U28 U31 U32 U35 U36 U39 U40 = SparkFun-AnalogIC; PROD_ID: IC-13549

## Nets
3.3V: C1.1 C2.1 C3.1 J18.1 JP1.2 R1.2 R5.2 U1.27 U2.5
3.3V1: C7.1 C8.1 C11.1 J37.1 JP2.2 R2.2 R9.2 U3.27 U6.5
3.3V2: C17.1 C18.1 C19.1 J57.1 JP3.2 R11.2 R14.2 U9.27 U10.5
3.3V3: C25.1 C26.1 C27.1 J77.1 JP4.2 R16.2 R19.2 U13.27 U14.5
3.3V4: C33.1 C34.1 C35.1 J97.1 JP5.2 R21.2 R24.2 U17.27 U18.5
3.3V5: C41.1 C42.1 C43.1 J117.1 JP6.2 R26.2 R29.2 U21.27 U22.5
3.3V6: C49.1 C50.1 C51.1 J137.1 JP7.2 R31.2 R34.2 U25.27 U26.5
3.3V7: C57.1 C58.1 C59.1 J157.1 JP8.2 R36.2 R39.2 U29.27 U30.5
3.3V8: C65.1 C66.1 C67.1 J177.1 JP9.2 R41.2 R44.2 U33.27 U34.5
3.3V9: C73.1 C74.1 C75.1 J197.1 JP10.2 R46.2 R49.2 U37.27 U38.5
BTN: SW2.1 U1.13
BTN1: SW4.1 U3.13
BTN2: SW6.1 U9.13
BTN3: SW8.1 U13.13
BTN4: SW10.1 U17.13
BTN5: SW12.1 U21.13
BTN6: SW14.1 U25.13
BTN7: SW16.1 U29.13
BTN8: SW18.1 U33.13
BTN9: SW20.1 U37.13
GND: C1.2 C2.2 C3.2 C4.2 C5.2 C6.2 C9.2 C10.2 D2.C D3.C D4.3 D5.3 D6.3 D7.3 D8.3 D9.3 J1.1 J2.1 J3.1 J4.1 J5.1 J6.1 J7.1 J8.1 J9.P1 J9.P3 J10.P1 J10.P3 J11.P1 J11.P3 J12.P1 J12.P3 J13.P1 J13.P3 J14.P1 J14.P3 J15.P1 J15.P3 J16.P1 J16.P3 J17.TIP J18.2 J20.TIP J21.1 J21.2 SW1.2 SW2.3 U1.26 U1.28 U1.EP U2.2 U4.3 U5.3
GND1: C7.2 C8.2 C11.2 C12.2 C13.2 C14.2 C15.2 C16.2 D1.C D10.C D11.3 D12.3 D13.3 D14.3 D15.3 D16.3 J19.1 J22.1 J23.1 J24.1 J25.1 J26.1 J27.1 J28.1 J29.P1 J29.P3 J30.P1 J30.P3 J31.P1 J31.P3 J32.P1 J32.P3 J33.P1 J33.P3 J34.P1 J34.P3 J35.P1 J35.P3 J36.P1 J36.P3 J37.2 J38.TIP J39.TIP J40.1 J40.2 SW3.2 SW4.3 U3.26 U3.28 U3.EP U6.2 U7.3 U8.3
GND2: C17.2 C18.2 C19.2 C20.2 C21.2 C22.2 C23.2 C24.2 D17.C D18.C D19.3 D20.3 D21.3 D22.3 D23.3 D24.3 J41.1 J42.1 J43.1 J44.1 J45.1 J46.1 J47.1 J48.1 J49.P1 J49.P3 J50.P1 J50.P3 J51.P1 J51.P3 J52.P1 J52.P3 J53.P1 J53.P3 J54.P1 J54.P3 J55.P1 J55.P3 J56.P1 J56.P3 J57.2 J58.TIP J59.TIP J60.1 J60.2 SW5.2 SW6.3 U9.26 U9.28 U9.EP U10.2 U11.3 U12.3
GND3: C25.2 C26.2 C27.2 C28.2 C29.2 C30.2 C31.2 C32.2 D25.C D26.C D27.3 D28.3 D29.3 D30.3 D31.3 D32.3 J61.1 J62.1 J63.1 J64.1 J65.1 J66.1 J67.1 J68.1 J69.P1 J69.P3 J70.P1 J70.P3 J71.P1 J71.P3 J72.P1 J72.P3 J73.P1 J73.P3 J74.P1 J74.P3 J75.P1 J75.P3 J76.P1 J76.P3 J77.2 J78.TIP J79.TIP J80.1 J80.2 SW7.2 SW8.3 U13.26 U13.28 U13.EP U14.2 U15.3 U16.3
GND4: C33.2 C34.2 C35.2 C36.2 C37.2 C38.2 C39.2 C40.2 D33.C D34.C D35.3 D36.3 D37.3 D38.3 D39.3 D40.3 J81.1 J82.1 J83.1 J84.1 J85.1 J86.1 J87.1 J88.1 J89.P1 J89.P3 J90.P1 J90.P3 J91.P1 J91.P3 J92.P1 J92.P3 J93.P1 J93.P3 J94.P1 J94.P3 J95.P1 J95.P3 J96.P1 J96.P3 J97.2 J98.TIP J99.TIP J100.1 J100.2 SW9.2 SW10.3 U17.26 U17.28 U17.EP U18.2 U19.3 U20.3
GND5: C41.2 C42.2 C43.2 C44.2 C45.2 C46.2 C47.2 C48.2 D41.C D42.C D43.3 D44.3 D45.3 D46.3 D47.3 D48.3 J101.1 J102.1 J103.1 J104.1 J105.1 J106.1 J107.1 J108.1 J109.P1 J109.P3 J110.P1 J110.P3 J111.P1 J111.P3 J112.P1 J112.P3 J113.P1 J113.P3 J114.P1 J114.P3 J115.P1 J115.P3 J116.P1 J116.P3 J117.2 J118.TIP J119.TIP J120.1 J120.2 SW11.2 SW12.3 U21.26 U21.28 U21.EP U22.2 U23.3 U24.3
GND6: C49.2 C50.2 C51.2 C52.2 C53.2 C54.2 C55.2 C56.2 D49.C D50.C D51.3 D52.3 D53.3 D54.3 D55.3 D56.3 J121.1 J122.1 J123.1 J124.1 J125.1 J126.1 J127.1 J128.1 J129.P1 J129.P3 J130.P1 J130.P3 J131.P1 J131.P3 J132.P1 J132.P3 J133.P1 J133.P3 J134.P1 J134.P3 J135.P1 J135.P3 J136.P1 J136.P3 J137.2 J138.TIP J139.TIP J140.1 J140.2 SW13.2 SW14.3 U25.26 U25.28 U25.EP U26.2 U27.3 U28.3
GND7: C57.2 C58.2 C59.2 C60.2 C61.2 C62.2 C63.2 C64.2 D57.C D58.C D59.3 D60.3 D61.3 D62.3 D63.3 D64.3 J141.1 J142.1 J143.1 J144.1 J145.1 J146.1 J147.1 J148.1 J149.P1 J149.P3 J150.P1 J150.P3 J151.P1 J151.P3 J152.P1 J152.P3 J153.P1 J153.P3 J154.P1 J154.P3 J155.P1 J155.P3 J156.P1 J156.P3 J157.2 J158.TIP J159.TIP J160.1 J160.2 SW15.2 SW16.3 U29.26 U29.28 U29.EP U30.2 U31.3 U32.3
GND8: C65.2 C66.2 C67.2 C68.2 C69.2 C70.2 C71.2 C72.2 D65.C D66.C D67.3 D68.3 D69.3 D70.3 D71.3 D72.3 J161.1 J162.1 J163.1 J164.1 J165.1 J166.1 J167.1 J168.1 J169.P1 J169.P3 J170.P1 J170.P3 J171.P1 J171.P3 J172.P1 J172.P3 J173.P1 J173.P3 J174.P1 J174.P3 J175.P1 J175.P3 J176.P1 J176.P3 J177.2 J178.TIP J179.TIP J180.1 J180.2 SW17.2 SW18.3 U33.26 U33.28 U33.EP U34.2 U35.3 U36.3
GND9: C73.2 C74.2 C75.2 C76.2 C77.2 C78.2 C79.2 C80.2 D73.C D74.C D75.3 D76.3 D77.3 D78.3 D79.3 D80.3 J181.1 J182.1 J183.1 J184.1 J185.1 J186.1 J187.1 J188.1 J189.P1 J189.P3 J190.P1 J190.P3 J191.P1 J191.P3 J192.P1 J192.P3 J193.P1 J193.P3 J194.P1 J194.P3 J195.P1 J195.P3 J196.P1 J196.P3 J197.2 J198.TIP J199.TIP J200.1 J200.2 SW19.2 SW20.3 U37.26 U37.28 U37.EP U38.2 U39.3 U40.3
I2C_OUT_EN: U1.17 U4.4 U5.4
I2C_OUT_EN1: U3.17 U7.4 U8.4
I2C_OUT_EN2: U9.17 U11.4 U12.4
I2C_OUT_EN3: U13.17 U15.4 U16.4
I2C_OUT_EN4: U17.17 U19.4 U20.4
I2C_OUT_EN5: U21.17 U23.4 U24.4
I2C_OUT_EN6: U25.17 U27.4 U28.4
I2C_OUT_EN7: U29.17 U31.4 U32.4
I2C_OUT_EN8: U33.17 U35.4 U36.4
I2C_OUT_EN9: U37.17 U39.4 U40.4
IN_0: D6.2 J1.2 J9.P2 J9.P4 U1.2
IN_1: D6.1 J2.2 J10.P2 J10.P4 U1.3
IN_2: D8.2 J3.2 J11.P2 J11.P4 U1.4
IN_3: D8.1 J4.2 J12.P2 J12.P4 U1.5
IN_4: D7.2 J5.2 J13.P2 J13.P4 U1.6
IN_5: D7.1 J6.2 J14.P2 J14.P4 U1.7
IN_6: D9.2 J7.2 J15.P2 J15.P4 U1.8
IN_7: D9.1 J8.2 J16.P2 J16.P4 U1.9
IN_8: D13.2 J19.2 J29.P2 J29.P4 U3.2
IN_9: D13.1 J22.2 J30.P2 J30.P4 U3.3
IN_10: D15.2 J23.2 J31.P2 J31.P4 U3.4
IN_11: D15.1 J24.2 J32.P2 J32.P4 U3.5
IN_12: D16.1 J28.2 J36.P2 J36.P4 U3.9
IN_13: D14.1 J26.2 J34.P2 J34.P4 U3.7
IN_14: D14.2 J25.2 J33.P2 J33.P4 U3.6
IN_15: D16.2 J27.2 J35.P2 J35.P4 U3.8
IN_16: D21.2 J41.2 J49.P2 J49.P4 U9.2
IN_17: D21.1 J42.2 J50.P2 J50.P4 U9.3
IN_18: D23.2 J43.2 J51.P2 J51.P4 U9.4
IN_19: D23.1 J44.2 J52.P2 J52.P4 U9.5
IN_20: D24.1 J48.2 J56.P2 J56.P4 U9.9
IN_21: D22.1 J46.2 J54.P2 J54.P4 U9.7
IN_22: D22.2 J45.2 J53.P2 J53.P4 U9.6
IN_23: D24.2 J47.2 J55.P2 J55.P4 U9.8
IN_24: D29.2 J61.2 J69.P2 J69.P4 U13.2
IN_25: D29.1 J62.2 J70.P2 J70.P4 U13.3
IN_26: D31.2 J63.2 J71.P2 J71.P4 U13.4
IN_27: D31.1 J64.2 J72.P2 J72.P4 U13.5
IN_28: D32.1 J68.2 J76.P2 J76.P4 U13.9
IN_29: D30.1 J66.2 J74.P2 J74.P4 U13.7
IN_30: D30.2 J65.2 J73.P2 J73.P4 U13.6
IN_31: D32.2 J67.2 J75.P2 J75.P4 U13.8
IN_32: D37.2 J81.2 J89.P2 J89.P4 U17.2
IN_33: D37.1 J82.2 J90.P2 J90.P4 U17.3
IN_34: D39.2 J83.2 J91.P2 J91.P4 U17.4
IN_35: D39.1 J84.2 J92.P2 J92.P4 U17.5
IN_36: D40.1 J88.2 J96.P2 J96.P4 U17.9
IN_37: D38.1 J86.2 J94.P2 J94.P4 U17.7
IN_38: D38.2 J85.2 J93.P2 J93.P4 U17.6
IN_39: D40.2 J87.2 J95.P2 J95.P4 U17.8
IN_40: D45.2 J101.2 J109.P2 J109.P4 U21.2
IN_41: D45.1 J102.2 J110.P2 J110.P4 U21.3
IN_42: D47.2 J103.2 J111.P2 J111.P4 U21.4
IN_43: D47.1 J104.2 J112.P2 J112.P4 U21.5
IN_44: D48.1 J108.2 J116.P2 J116.P4 U21.9
IN_45: D46.1 J106.2 J114.P2 J114.P4 U21.7
IN_46: D46.2 J105.2 J113.P2 J113.P4 U21.6
IN_47: D48.2 J107.2 J115.P2 J115.P4 U21.8
IN_48: D53.2 J121.2 J129.P2 J129.P4 U25.2
IN_49: D53.1 J122.2 J130.P2 J130.P4 U25.3
IN_50: D55.2 J123.2 J131.P2 J131.P4 U25.4
IN_51: D55.1 J124.2 J132.P2 J132.P4 U25.5
IN_52: D56.1 J128.2 J136.P2 J136.P4 U25.9
IN_53: D54.1 J126.2 J134.P2 J134.P4 U25.7
IN_54: D54.2 J125.2 J133.P2 J133.P4 U25.6
IN_55: D56.2 J127.2 J135.P2 J135.P4 U25.8
IN_56: D61.2 J141.2 J149.P2 J149.P4 U29.2
IN_57: D61.1 J142.2 J150.P2 J150.P4 U29.3
IN_58: D63.2 J143.2 J151.P2 J151.P4 U29.4
IN_59: D63.1 J144.2 J152.P2 J152.P4 U29.5
IN_60: D64.1 J148.2 J156.P2 J156.P4 U29.9
IN_61: D62.1 J146.2 J154.P2 J154.P4 U29.7
IN_62: D62.2 J145.2 J153.P2 J153.P4 U29.6
IN_63: D64.2 J147.2 J155.P2 J155.P4 U29.8
IN_64: D69.2 J161.2 J169.P2 J169.P4 U33.2
IN_65: D69.1 J162.2 J170.P2 J170.P4 U33.3
IN_66: D71.2 J163.2 J171.P2 J171.P4 U33.4
IN_67: D71.1 J164.2 J172.P2 J172.P4 U33.5
IN_68: D72.1 J168.2 J176.P2 J176.P4 U33.9
IN_69: D70.1 J166.2 J174.P2 J174.P4 U33.7
IN_70: D70.2 J165.2 J173.P2 J173.P4 U33.6
IN_71: D72.2 J167.2 J175.P2 J175.P4 U33.8
IN_72: D77.2 J181.2 J189.P2 J189.P4 U37.2
IN_73: D77.1 J182.2 J190.P2 J190.P4 U37.3
IN_74: D79.2 J183.2 J191.P2 J191.P4 U37.4
IN_75: D79.1 J184.2 J192.P2 J192.P4 U37.5
IN_76: D80.1 J188.2 J196.P2 J196.P4 U37.9
IN_77: D78.1 J186.2 J194.P2 J194.P4 U37.7
IN_78: D78.2 J185.2 J193.P2 J193.P4 U37.6
IN_79: D80.2 J187.2 J195.P2 J195.P4 U37.8
LED: R6.2 U1.14
LED1: R10.2 U3.14
LED2: R15.2 U9.14
LED3: R20.2 U13.14
LED4: R25.2 U17.14
LED5: R30.2 U21.14
LED6: R35.2 U25.14
LED7: R40.2 U29.14
LED8: R45.2 U33.14
LED9: R50.2 U37.14
N$2: JP1.3 R3.2
N$3: JP2.3 R7.2
N$4: D2.A R5.1
N$5: D3.A R6.1
N$6: JP1.1 R4.2
N$17: JP2.1 R8.2
N$18: D1.A R9.1
N$19: D10.A R10.1
N$30: JP3.3 R12.2
N$31: JP3.1 R13.2
N$32: D17.A R14.1
N$33: D18.A R15.1
N$44: JP4.3 R17.2
N$45: JP4.1 R18.2
N$46: D25.A R19.1
N$47: D26.A R20.1
N$58: JP5.3 R22.2
N$59: JP5.1 R23.2
N$60: D33.A R24.1
N$61: D34.A R25.1
N$72: JP6.3 R27.2
N$73: JP6.1 R28.2
N$74: D41.A R29.1
N$75: D42.A R30.1
N$86: JP7.3 R32.2
N$87: JP7.1 R33.2
N$88: D49.A R34.1
N$89: D50.A R35.1
N$100: JP8.3 R37.2
N$101: JP8.1 R38.2
N$102: D57.A R39.1
N$103: D58.A R40.1
N$114: JP9.3 R42.2
N$115: JP9.1 R43.2
N$116: D65.A R44.1
N$117: D66.A R45.1
N$128: JP10.3 R47.2
N$129: JP10.1 R48.2
N$130: D73.A R49.1
N$131: D74.A R50.1
RXI: J21.4 U1.21
RXI1: J40.4 U3.21
RXI2: J60.4 U9.21
RXI3: J80.4 U13.21
RXI4: J100.4 U17.21
RXI5: J120.4 U21.21
RXI6: J140.4 U25.21
RXI7: J160.4 U29.21
RXI8: J180.4 U33.21
RXI9: J200.4 U37.21
SCL: D4.1 J17.RING2 R3.1 U1.29 U4.1
SCL1: D11.1 J38.RING2 R7.1 U3.29 U7.1
SCL2: D19.1 J58.RING2 R12.1 U9.29 U11.1
SCL3: D27.1 J78.RING2 R17.1 U13.29 U15.1
SCL4: D35.1 J98.RING2 R22.1 U17.29 U19.1
SCL5: D43.1 J118.RING2 R27.1 U21.29 U23.1
SCL6: D51.1 J138.RING2 R32.1 U25.29 U27.1
SCL7: D59.1 J158.RING2 R37.1 U29.29 U31.1
SCL8: D67.1 J178.RING2 R42.1 U33.29 U35.1
SCL9: D75.1 J198.RING2 R47.1 U37.29 U39.1
SCL_OUT: J20.RING2 U4.2
SCL_OUT1: J39.RING2 U7.2
SCL_OUT2: J59.RING2 U11.2
SCL_OUT3: J79.RING2 U15.2
SCL_OUT4: J99.RING2 U19.2
SCL_OUT5: J119.RING2 U23.2
SCL_OUT6: J139.RING2 U27.2
SCL_OUT7: J159.RING2 U31.2
SCL_OUT8: J179.RING2 U35.2
SCL_OUT9: J199.RING2 U39.2
SDA: D4.2 J17.RING1 R4.1 U1.30 U5.1
SDA1: D11.2 J38.RING1 R8.1 U3.30 U8.1
SDA2: D19.2 J58.RING1 R13.1 U9.30 U12.1
SDA3: D27.2 J78.RING1 R18.1 U13.30 U16.1
SDA4: D35.2 J98.RING1 R23.1 U17.30 U20.1
SDA5: D43.2 J118.RING1 R28.1 U21.30 U24.1
SDA6: D51.2 J138.RING1 R33.1 U25.30 U28.1
SDA7: D59.2 J158.RING1 R38.1 U29.30 U32.1
SDA8: D67.2 J178.RING1 R43.1 U33.30 U36.1
SDA9: D75.2 J198.RING1 R48.1 U37.30 U40.1
SDA_OUT: J20.RING1 U5.2
SDA_OUT1: J39.RING1 U8.2
SDA_OUT2: J59.RING1 U12.2
SDA_OUT3: J79.RING1 U16.2
SDA_OUT4: J99.RING1 U20.2
SDA_OUT5: J119.RING1 U24.2
SDA_OUT6: J139.RING1 U28.2
SDA_OUT7: J159.RING1 U32.2
SDA_OUT8: J179.RING1 U36.2
SDA_OUT9: J199.RING1 U40.2
SWD_CLK: J18.4 U1.12
SWD_CLK1: J37.4 U3.12
SWD_CLK2: J57.4 U9.12
SWD_CLK3: J77.4 U13.12
SWD_CLK4: J97.4 U17.12
SWD_CLK5: J117.4 U21.12
SWD_CLK6: J137.4 U25.12
SWD_CLK7: J157.4 U29.12
SWD_CLK8: J177.4 U33.12
SWD_CLK9: J197.4 U37.12
SWD_DATA: J18.5 U1.11
SWD_DATA1: J37.5 U3.11
SWD_DATA2: J57.5 U9.11
SWD_DATA3: J77.5 U13.11
SWD_DATA4: J97.5 U17.11
SWD_DATA5: J117.5 U21.11
SWD_DATA6: J137.5 U25.11
SWD_DATA7: J157.5 U29.11
SWD_DATA8: J177.5 U33.11
SWD_DATA9: J197.5 U37.11
TXO: J21.5 U1.22
TXO1: J40.5 U3.22
TXO2: J60.5 U9.22
TXO3: J80.5 U13.22
TXO4: J100.5 U17.22
TXO5: J120.5 U21.22
TXO6: J140.5 U25.22
TXO7: J160.5 U29.22
TXO8: J180.5 U33.22
TXO9: J200.5 U37.22
VCC: C4.1 U1.25
VCC1: C12.1 U3.25
VCC2: C20.1 U9.25
VCC3: C28.1 U13.25
VCC4: C36.1 U17.25
VCC5: C44.1 U21.25
VCC6: C52.1 U25.25
VCC7: C60.1 U29.25
VCC8: C68.1 U33.25
VCC9: C76.1 U37.25
VIN: C5.1 C6.1 C9.1 C10.1 D5.2 J17.EARTH J20.EARTH U2.1 U2.3 U4.5 U5.5
VIN1: C13.1 C14.1 C15.1 C16.1 D12.2 J38.EARTH J39.EARTH U6.1 U6.3 U7.5 U8.5
VIN2: C21.1 C22.1 C23.1 C24.1 D20.2 J58.EARTH J59.EARTH U10.1 U10.3 U11.5 U12.5
VIN3: C29.1 C30.1 C31.1 C32.1 D28.2 J78.EARTH J79.EARTH U14.1 U14.3 U15.5 U16.5
VIN4: C37.1 C38.1 C39.1 C40.1 D36.2 J98.EARTH J99.EARTH U18.1 U18.3 U19.5 U20.5
VIN5: C45.1 C46.1 C47.1 C48.1 D44.2 J118.EARTH J119.EARTH U22.1 U22.3 U23.5 U24.5
VIN6: C53.1 C54.1 C55.1 C56.1 D52.2 J138.EARTH J139.EARTH U26.1 U26.3 U27.5 U28.5
VIN7: C61.1 C62.1 C63.1 C64.1 D60.2 J158.EARTH J159.EARTH U30.1 U30.3 U31.5 U32.5
VIN8: C69.1 C70.1 C71.1 C72.1 D68.2 J178.EARTH J179.EARTH U34.1 U34.3 U35.5 U36.5
VIN9: C77.1 C78.1 C79.1 C80.1 D76.2 J198.EARTH J199.EARTH U38.1 U38.3 U39.5 U40.5
XRES: J18.3 R1.1 SW1.4 U1.24
XRES1: J37.3 R2.1 SW3.4 U3.24
XRES2: J57.3 R11.1 SW5.4 U9.24
XRES3: J77.3 R16.1 SW7.4 U13.24
XRES4: J97.3 R21.1 SW9.4 U17.24
XRES5: J117.3 R26.1 SW11.4 U21.24
XRES6: J137.3 R31.1 SW13.4 U25.24
XRES7: J157.3 R36.1 SW15.4 U29.24
XRES8: J177.3 R41.1 SW17.4 U33.24
XRES9: J197.3 R46.1 SW19.4 U37.24

## Tracks (layer width: path | path; a pad name or v marks a point on that pad's centre or on a via)
3.3V  (via drill 0.25)
  Top 0.203: C3.1 v31.37,45.59 31.75,45.59 31.86,45.71 U1.27 | R1.2 31.28,51.78 v31.24,51.82 31.24,52.58 31.5,52.83 33.91,52.83 34.29,53.21 51.44,53.21 51.69,53.47 51.69,57.4 51.94,57.66 J18.1 | JP1.2 v29.08,37.21
  Top 0.406: C2.1 C3.1 | U2.5 37.15,32.83 | 37.15,32.83 37.38,32.6 C1.1 | R5.2 37.19,34.46 37.15,34.42 | 37.15,32.83 37.15,34.42 | 37.15,34.42 37.15,36.13 v37.08,36.2
  Bottom 0.203: v31.37,45.59 31.37,51.69 v31.24,51.82 | v29.08,37.21 31.37,37.21
  Bottom 0.406: v37.08,36.2 32,36.2 31.37,36.83 31.37,37.21 v31.37,45.59
3.3V1  (via drill 0.25)
  Top 0.203: C11.1 v79.38,45.59 79.76,45.59 79.87,45.71 U3.27 | R2.2 79.29,51.78 v79.25,51.82 79.25,52.58 79.5,52.83 81.92,52.83 82.3,53.21 99.44,53.21 99.69,53.47 99.69,57.4 99.95,57.66 J37.1 | JP2.2 v77.09,37.21
  Top 0.406: C8.1 C11.1 | U6.5 85.16,32.83 | 85.16,32.83 85.38,32.6 C7.1 | R9.2 85.19,34.46 85.16,34.42 | 85.16,32.83 85.16,34.42 | 85.16,34.42 85.16,36.13 v85.09,36.2
  Bottom 0.203: v79.38,45.59 79.38,51.69 v79.25,51.82 | v77.09,37.21 79.38,37.21
  Bottom 0.406: v85.09,36.2 80.01,36.2 79.38,36.83 79.38,37.21 v79.38,45.59
3.3V2  (via drill 0.25)
  Top 0.203: C19.1 v127.38,45.59 127.76,45.59 127.88,45.71 U9.27 | R11.2 127.29,51.78 v127.25,51.82 127.25,52.58 127.51,52.83 129.92,52.83 130.3,53.21 147.45,53.21 147.7,53.47 147.7,57.4 147.96,57.66 J57.1 | JP3.2 v125.09,37.21
  Top 0.406: C18.1 C19.1 | U10.5 133.16,32.83 | 133.16,32.83 133.39,32.6 C17.1 | R14.2 133.2,34.46 133.16,34.42 | 133.16,32.83 133.16,34.42 | 133.16,34.42 133.16,36.13 v133.1,36.2
  Bottom 0.203: v127.38,45.59 127.38,51.69 v127.25,51.82 | v125.09,37.21 127.38,37.21
  Bottom 0.406: v133.1,36.2 128.02,36.2 127.38,36.83 127.38,37.21 v127.38,45.59
3.3V3  (via drill 0.25)
  Top 0.203: C27.1 v175.39,45.59 175.77,45.59 175.88,45.71 U13.27 | R16.2 175.3,51.78 v175.26,51.82 175.26,52.58 175.51,52.83 177.93,52.83 178.31,53.21 195.45,53.21 195.71,53.47 195.71,57.4 195.96,57.66 J77.1 | JP4.2 v173.1,37.21
  Top 0.406: C26.1 C27.1 | U14.5 181.17,32.83 | 181.17,32.83 181.4,32.6 C25.1 | R19.2 181.21,34.46 181.17,34.42 | 181.17,32.83 181.17,34.42 | 181.17,34.42 181.17,36.13 v181.1,36.2
  Bottom 0.203: v175.39,45.59 175.39,51.69 v175.26,51.82 | v173.1,37.21 175.39,37.21
  Bottom 0.406: v181.1,36.2 176.02,36.2 175.39,36.83 175.39,37.21 v175.39,45.59
3.3V4  (via drill 0.25)
  Top 0.203: C35.1 v223.39,45.59 223.77,45.59 223.89,45.71 U17.27 | R21.2 223.31,51.78 v223.27,51.82 223.27,52.58 223.52,52.83 225.93,52.83 226.31,53.21 243.46,53.21 243.71,53.47 243.71,57.4 243.97,57.66 J97.1 | JP5.2 v221.11,37.21
  Top 0.406: C34.1 C35.1 | U18.5 229.17,32.83 | 229.17,32.83 229.4,32.6 C33.1 | R24.2 229.21,34.46 229.17,34.42 | 229.17,32.83 229.17,34.42 | 229.17,34.42 229.17,36.13 v229.11,36.2
  Bottom 0.203: v223.39,45.59 223.39,51.69 v223.27,51.82 | v221.11,37.21 223.39,37.21
  Bottom 0.406: v229.11,36.2 224.03,36.2 223.39,36.83 223.39,37.21 v223.39,45.59
3.3V5  (via drill 0.25)
  Top 0.203: C43.1 v31.37,119.76 31.75,119.76 31.86,119.88 U21.27 | R26.2 31.28,125.94 v31.24,125.98 31.24,126.75 31.5,127 33.91,127 34.29,127.38 51.44,127.38 51.69,127.64 51.69,131.57 51.94,131.83 J117.1 | JP6.2 v29.08,111.38
  Top 0.406: C42.1 C43.1 | U22.5 37.15,107 | 37.15,107 37.38,106.77 C41.1 | R29.2 37.19,108.62 37.15,108.58 | 37.15,107 37.15,108.58 | 37.15,108.58 37.15,110.3 v37.08,110.36
  Bottom 0.203: v31.37,119.76 31.37,125.86 v31.24,125.98 | v29.08,111.38 31.37,111.38
  Bottom 0.406: v37.08,110.36 32,110.36 31.37,111 31.37,111.38 v31.37,119.76
3.3V6  (via drill 0.25)
  Top 0.203: C51.1 v79.38,119.76 79.76,119.76 79.87,119.88 U25.27 | R31.2 79.29,125.94 v79.25,125.98 79.25,126.75 79.5,127 81.92,127 82.3,127.38 99.44,127.38 99.69,127.64 99.69,131.57 99.95,131.83 J137.1 | JP7.2 v77.09,111.38
  Top 0.406: C50.1 C51.1 | U26.5 85.16,107 | 85.16,107 85.38,106.77 C49.1 | R34.2 85.19,108.62 85.16,108.58 | 85.16,107 85.16,108.58 | 85.16,108.58 85.16,110.3 v85.09,110.36
  Bottom 0.203: v79.38,119.76 79.38,125.86 v79.25,125.98 | v77.09,111.38 79.38,111.38
  Bottom 0.406: v85.09,110.36 80.01,110.36 79.38,111 79.38,111.38 v79.38,119.76
3.3V7  (via drill 0.25)
  Top 0.203: C59.1 v127.38,119.76 127.76,119.76 127.88,119.88 U29.27 | R36.2 127.29,125.94 v127.25,125.98 127.25,126.75 127.51,127 129.92,127 130.3,127.38 147.45,127.38 147.7,127.64 147.7,131.57 147.96,131.83 J157.1 | JP8.2 v125.09,111.38
  Top 0.406: C58.1 C59.1 | U30.5 133.16,107 | 133.16,107 133.39,106.77 C57.1 | R39.2 133.2,108.62 133.16,108.58 | 133.16,107 133.16,108.58 | 133.16,108.58 133.16,110.3 v133.1,110.36
  Bottom 0.203: v127.38,119.76 127.38,125.86 v127.25,125.98 | v125.09,111.38 127.38,111.38
  Bottom 0.406: v133.1,110.36 128.02,110.36 127.38,111 127.38,111.38 v127.38,119.76
3.3V8  (via drill 0.25)
  Top 0.203: C67.1 v175.39,119.76 175.77,119.76 175.88,119.88 U33.27 | R41.2 175.3,125.94 v175.26,125.98 175.26,126.75 175.51,127 177.93,127 178.31,127.38 195.45,127.38 195.71,127.64 195.71,131.57 195.96,131.83 J177.1 | JP9.2 v173.1,111.38
  Top 0.406: C66.1 C67.1 | U34.5 181.17,107 | 181.17,107 181.4,106.77 C65.1 | R44.2 181.21,108.62 181.17,108.58 | 181.17,107 181.17,108.58 | 181.17,108.58 181.17,110.3 v181.1,110.36
  Bottom 0.203: v175.39,119.76 175.39,125.86 v175.26,125.98 | v173.1,111.38 175.39,111.38
  Bottom 0.406: v181.1,110.36 176.02,110.36 175.39,111 175.39,111.38 v175.39,119.76
3.3V9  (via drill 0.25)
  Top 0.203: C75.1 v223.39,119.76 223.77,119.76 223.89,119.88 U37.27 | R46.2 223.31,125.94 v223.27,125.98 223.27,126.75 223.52,127 225.93,127 226.31,127.38 243.46,127.38 243.71,127.64 243.71,131.57 243.97,131.83 J197.1 | JP10.2 v221.11,111.38
  Top 0.406: C74.1 C75.1 | U38.5 229.17,107 | 229.17,107 229.4,106.77 C73.1 | R49.2 229.21,108.62 229.17,108.58 | 229.17,107 229.17,108.58 | 229.17,108.58 229.17,110.3 v229.11,110.36
  Bottom 0.203: v223.39,119.76 223.39,125.86 v223.27,125.98 | v221.11,111.38 223.39,111.38
  Bottom 0.406: v229.11,110.36 224.03,110.36 223.39,111 223.39,111.38 v223.39,119.76
BTN
  Top 0.203: U1.13 45.97,45.21 46.27,45.5 SW2.1
BTN1
  Top 0.203: U3.13 93.98,45.21 94.27,45.5 SW4.1
BTN2
  Top 0.203: U9.13 141.98,45.21 142.28,45.5 SW6.1
BTN3
  Top 0.203: U13.13 189.99,45.21 190.28,45.5 SW8.1
BTN4
  Top 0.203: U17.13 237.99,45.21 238.29,45.5 SW10.1
BTN5
  Top 0.203: U21.13 45.97,119.38 46.27,119.67 SW12.1
BTN6
  Top 0.203: U25.13 93.98,119.38 94.27,119.67 SW14.1
BTN7
  Top 0.203: U29.13 141.98,119.38 142.28,119.67 SW16.1
BTN8
  Top 0.203: U33.13 189.99,119.38 190.28,119.67 SW18.1
BTN9
  Top 0.203: U37.13 237.99,119.38 238.29,119.67 SW20.1
GND  (via drill 0.25)
  Top 0.203: v34.29,43.94 U1.EP | U1.26 34.06,46.21 v34.29,45.97
  other vias: 42.93,51.31 39.12,47.5 36.32,45.97 36.32,43.94 50.67,16.38 50.67,12.06 18.67,13.97 18.54,22.99
  pour Bottom (isolate 0.305): 11.18,80.52 53.09,80.52 arc-90 54.36,79.25 54.36,8.13 arc-90 53.09,6.86 11.18,6.86 arc-90 9.91,8.13 9.91,79.25 arc-90
  pour Top: 54.36,8.13 54.36,79.25 arc90 53.09,80.52 11.18,80.52 arc90 9.91,79.25 9.91,8.13 arc90 11.18,6.86 53.09,6.86 arc90
GND1  (via drill 0.25)
  Top 0.203: v82.3,43.94 U3.EP | U3.26 82.06,46.21 v82.3,45.97
  other vias: 90.93,51.31 87.12,47.5 84.33,45.97 84.33,43.94 98.68,16.38 98.68,12.06 66.67,13.97 66.55,22.99
  pour Bottom (isolate 0.305): 59.18,80.52 101.09,80.52 arc-90 102.36,79.25 102.36,8.13 arc-90 101.09,6.86 59.18,6.86 arc-90 57.91,8.13 57.91,79.25 arc-90
  pour Top: 102.36,8.13 102.36,79.25 arc90 101.09,80.52 59.18,80.52 arc90 57.91,79.25 57.91,8.13 arc90 59.18,6.86 101.09,6.86 arc90
GND2  (via drill 0.25)
  Top 0.203: v130.3,43.94 U9.EP | U9.26 130.07,46.21 v130.3,45.97
  other vias: 138.94,51.31 135.13,47.5 132.33,45.97 132.33,43.94 146.69,16.38 146.69,12.06 114.68,13.97 114.55,22.99
  pour Bottom (isolate 0.305): 107.19,80.52 149.1,80.52 arc-90 150.37,79.25 150.37,8.13 arc-90 149.1,6.86 107.19,6.86 arc-90 105.92,8.13 105.92,79.25 arc-90
  pour Top: 150.37,8.13 150.37,79.25 arc90 149.1,80.52 107.19,80.52 arc90 105.92,79.25 105.92,8.13 arc90 107.19,6.86 149.1,6.86 arc90
GND3  (via drill 0.25)
  Top 0.203: v178.31,43.94 U13.EP | U13.26 178.07,46.21 v178.31,45.97
  other vias: 186.94,51.31 183.13,47.5 180.34,45.97 180.34,43.94 194.69,16.38 194.69,12.06 162.69,13.97 162.56,22.99
  pour Bottom (isolate 0.305): 155.19,80.52 197.1,80.52 arc-90 198.37,79.25 198.37,8.13 arc-90 197.1,6.86 155.19,6.86 arc-90 153.92,8.13 153.92,79.25 arc-90
  pour Top: 198.37,8.13 198.37,79.25 arc90 197.1,80.52 155.19,80.52 arc90 153.92,79.25 153.92,8.13 arc90 155.19,6.86 197.1,6.86 arc90
GND4  (via drill 0.25)
  Top 0.203: v226.31,43.94 U17.EP | U17.26 226.08,46.21 v226.31,45.97